# Altium PCB leo_power_pcb.PcbDoc (part 1 of 3)
Units mm, origin at the board's own origin, x right, y up, seen from the top; angles counter-clockwise.
Board outline 127 x 85.5 mm, 4 copper layers (TOP_Layer, INT1_GND, INT2_GND, BOTTOM_Layer), stack 1.586 mm thick; 172 components, 108 nets, 524 pads, 275 vias.
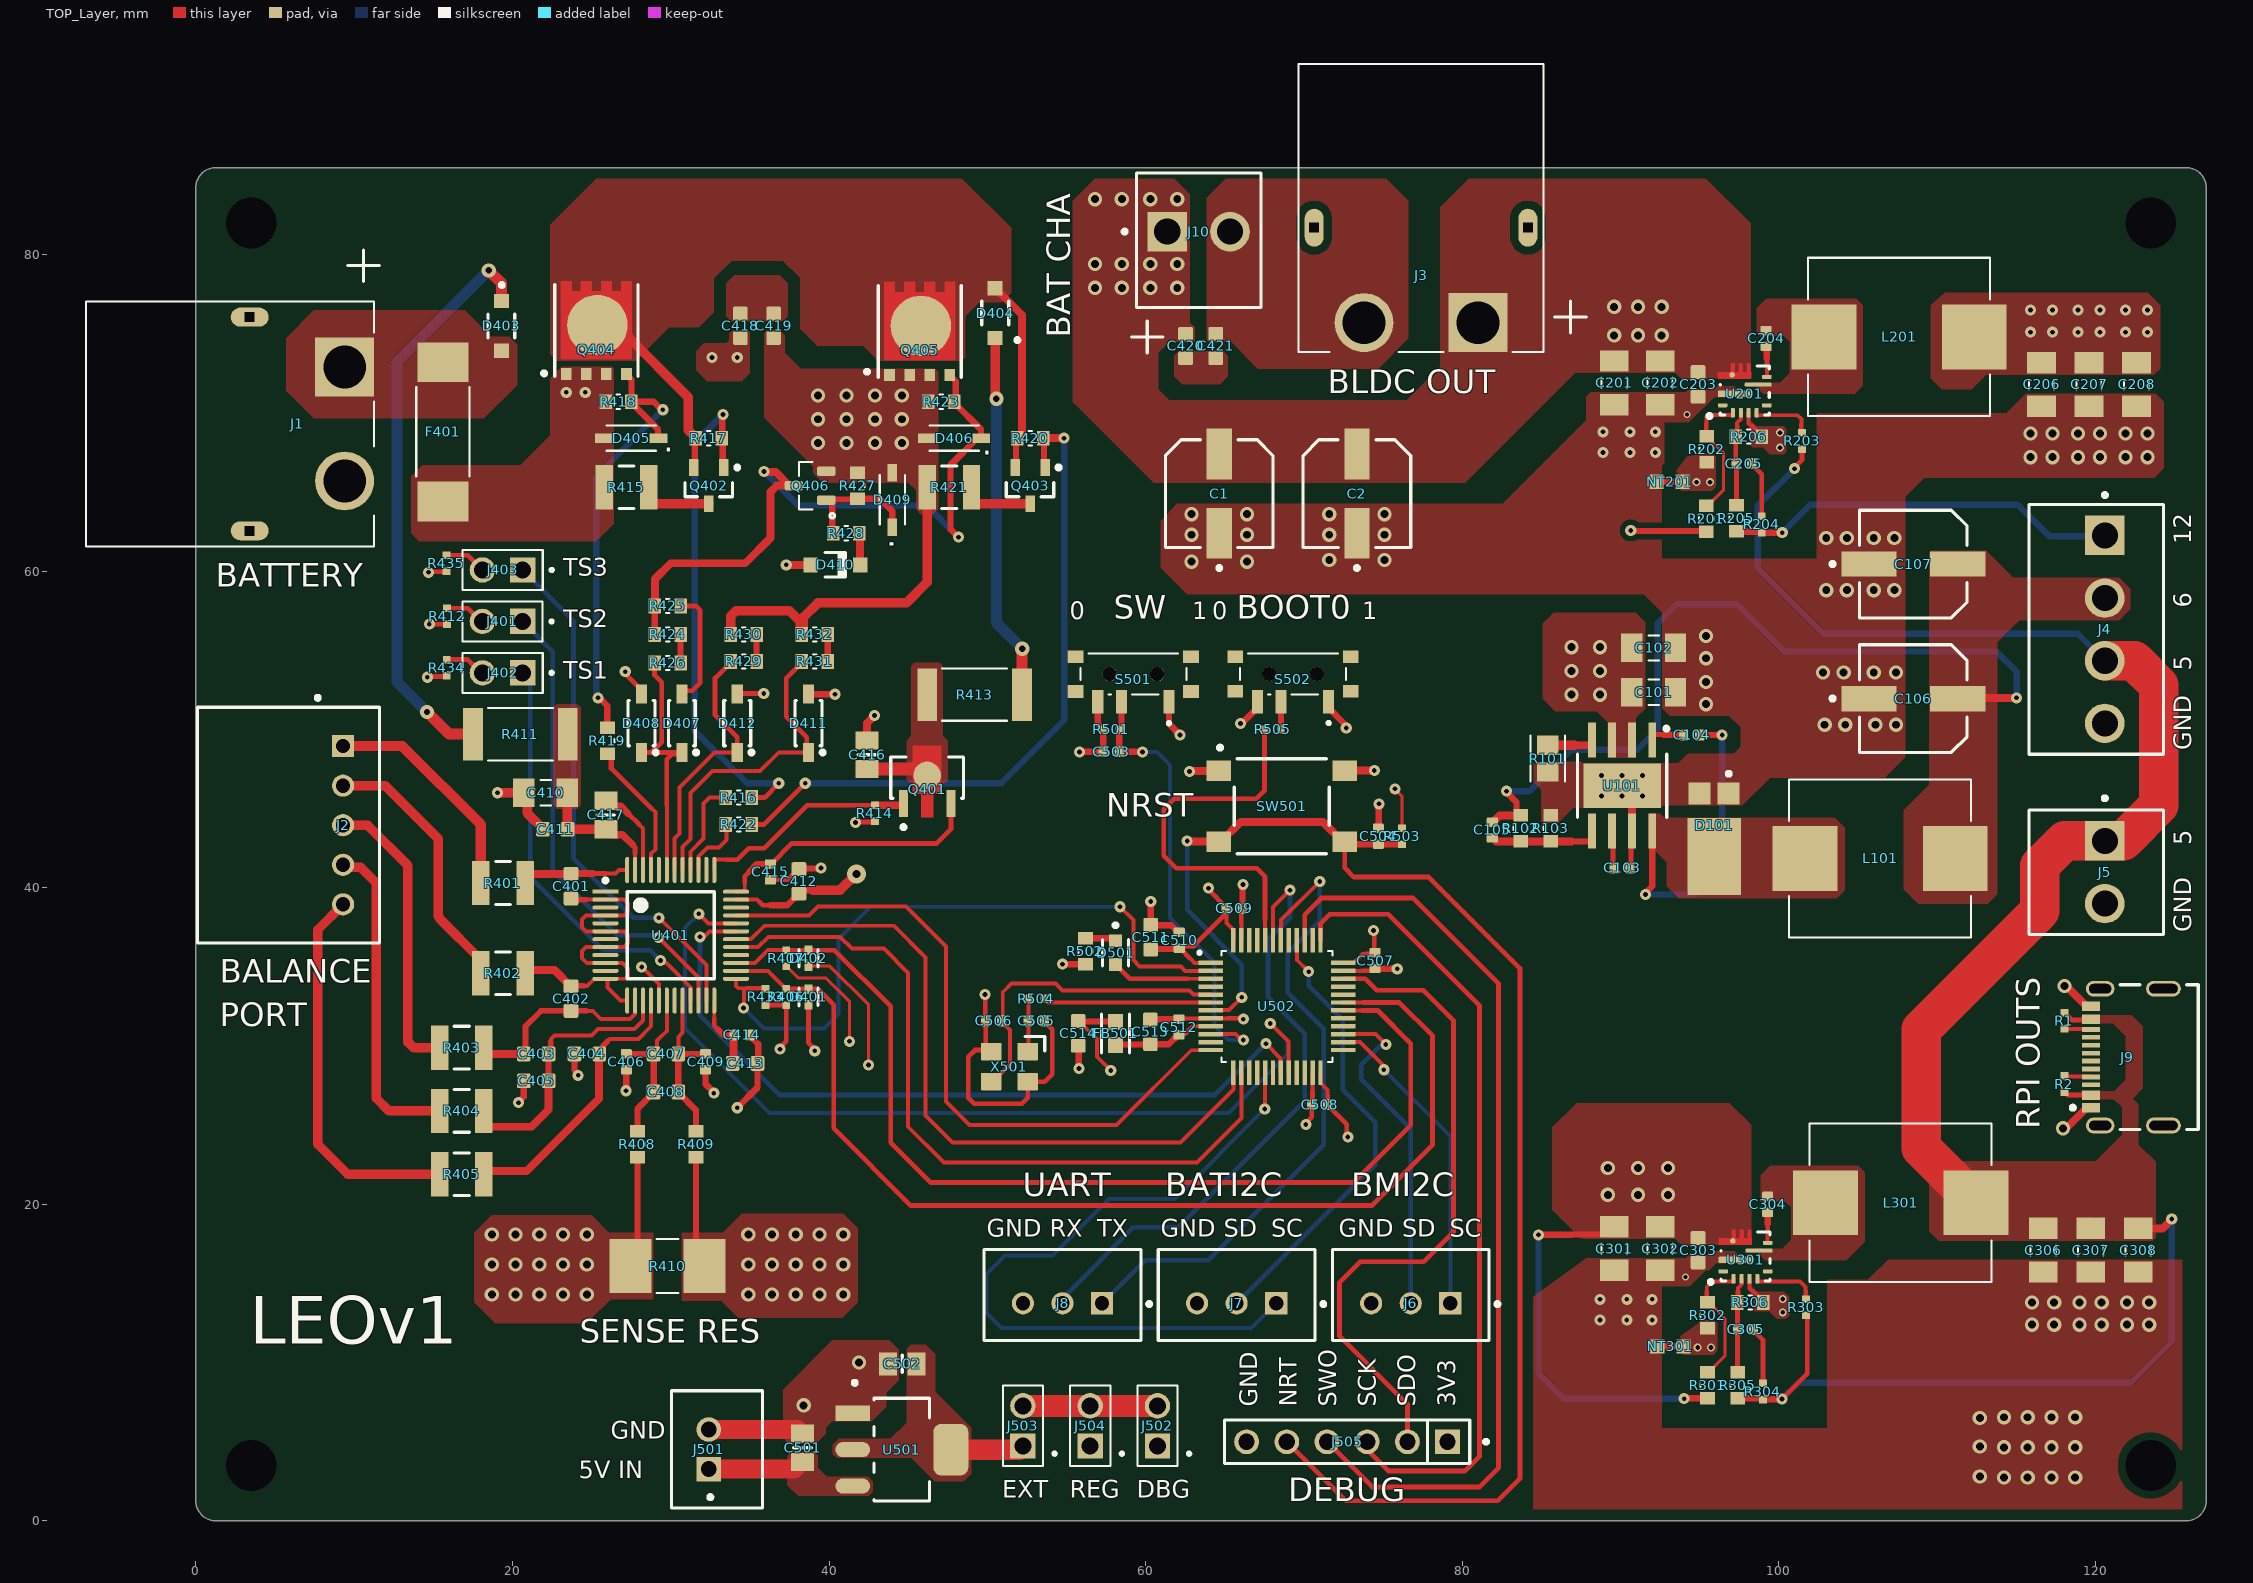
[diagram p0: TOP_Layer view]
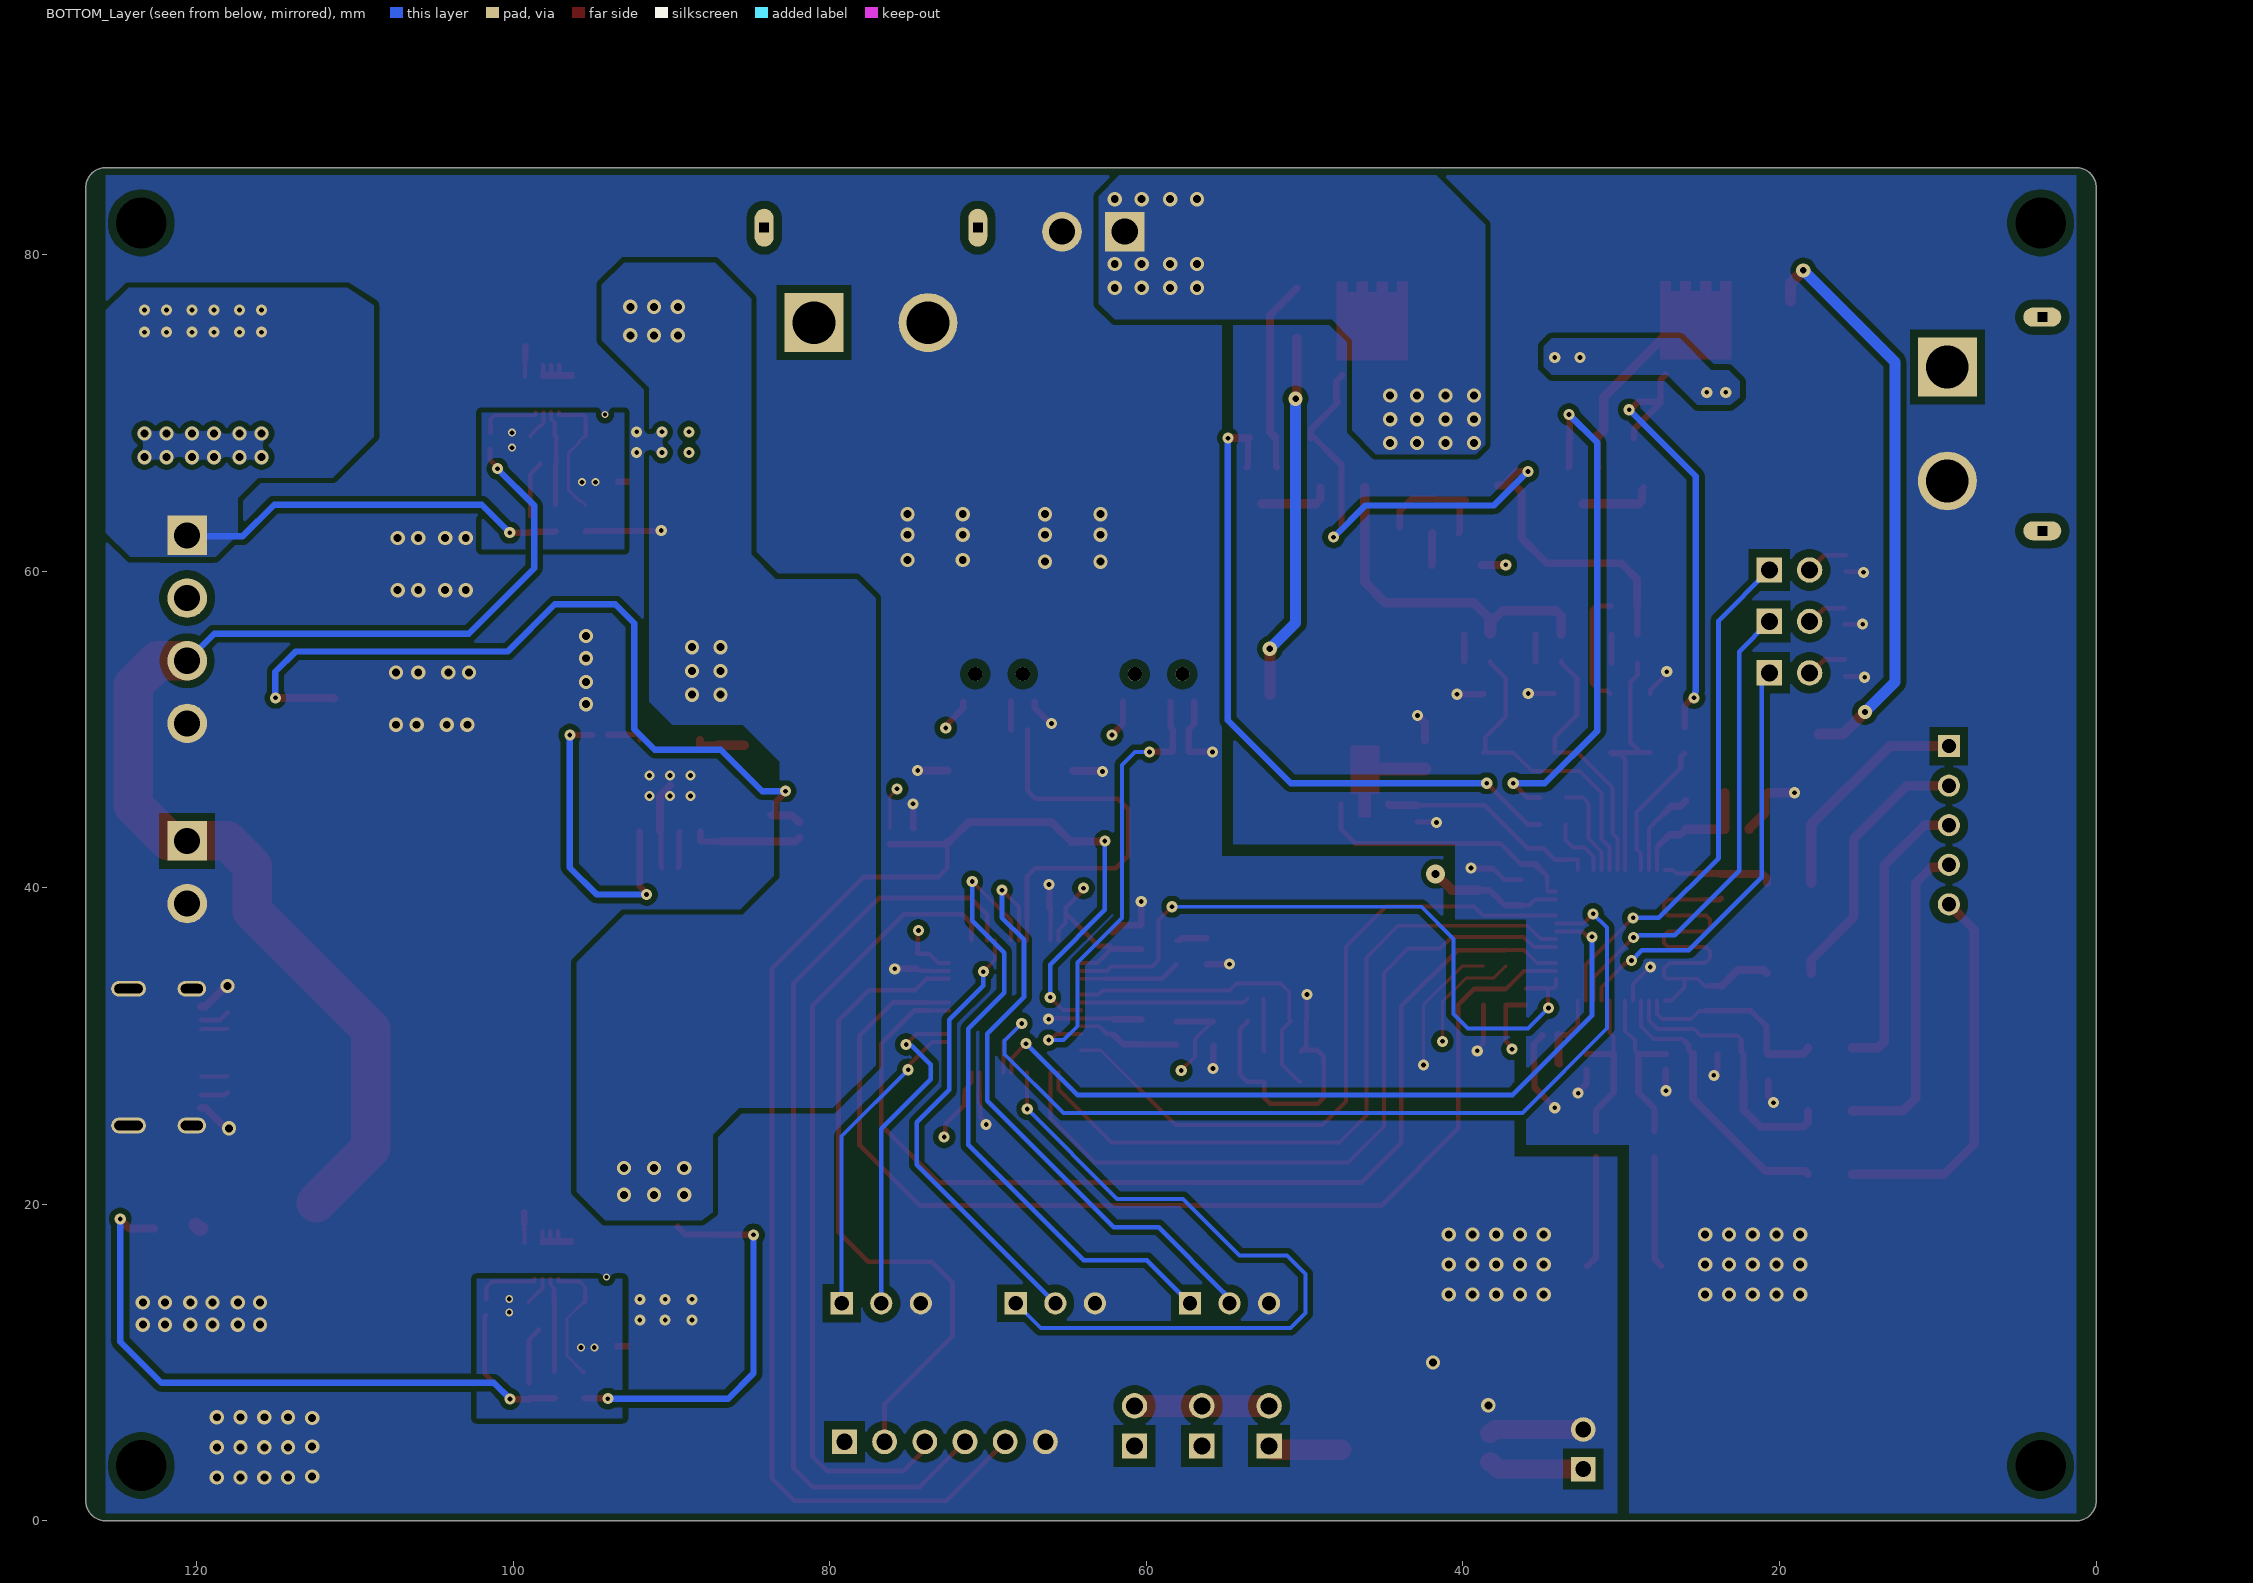
[diagram p1: BOTTOM_Layer view, seen from below]
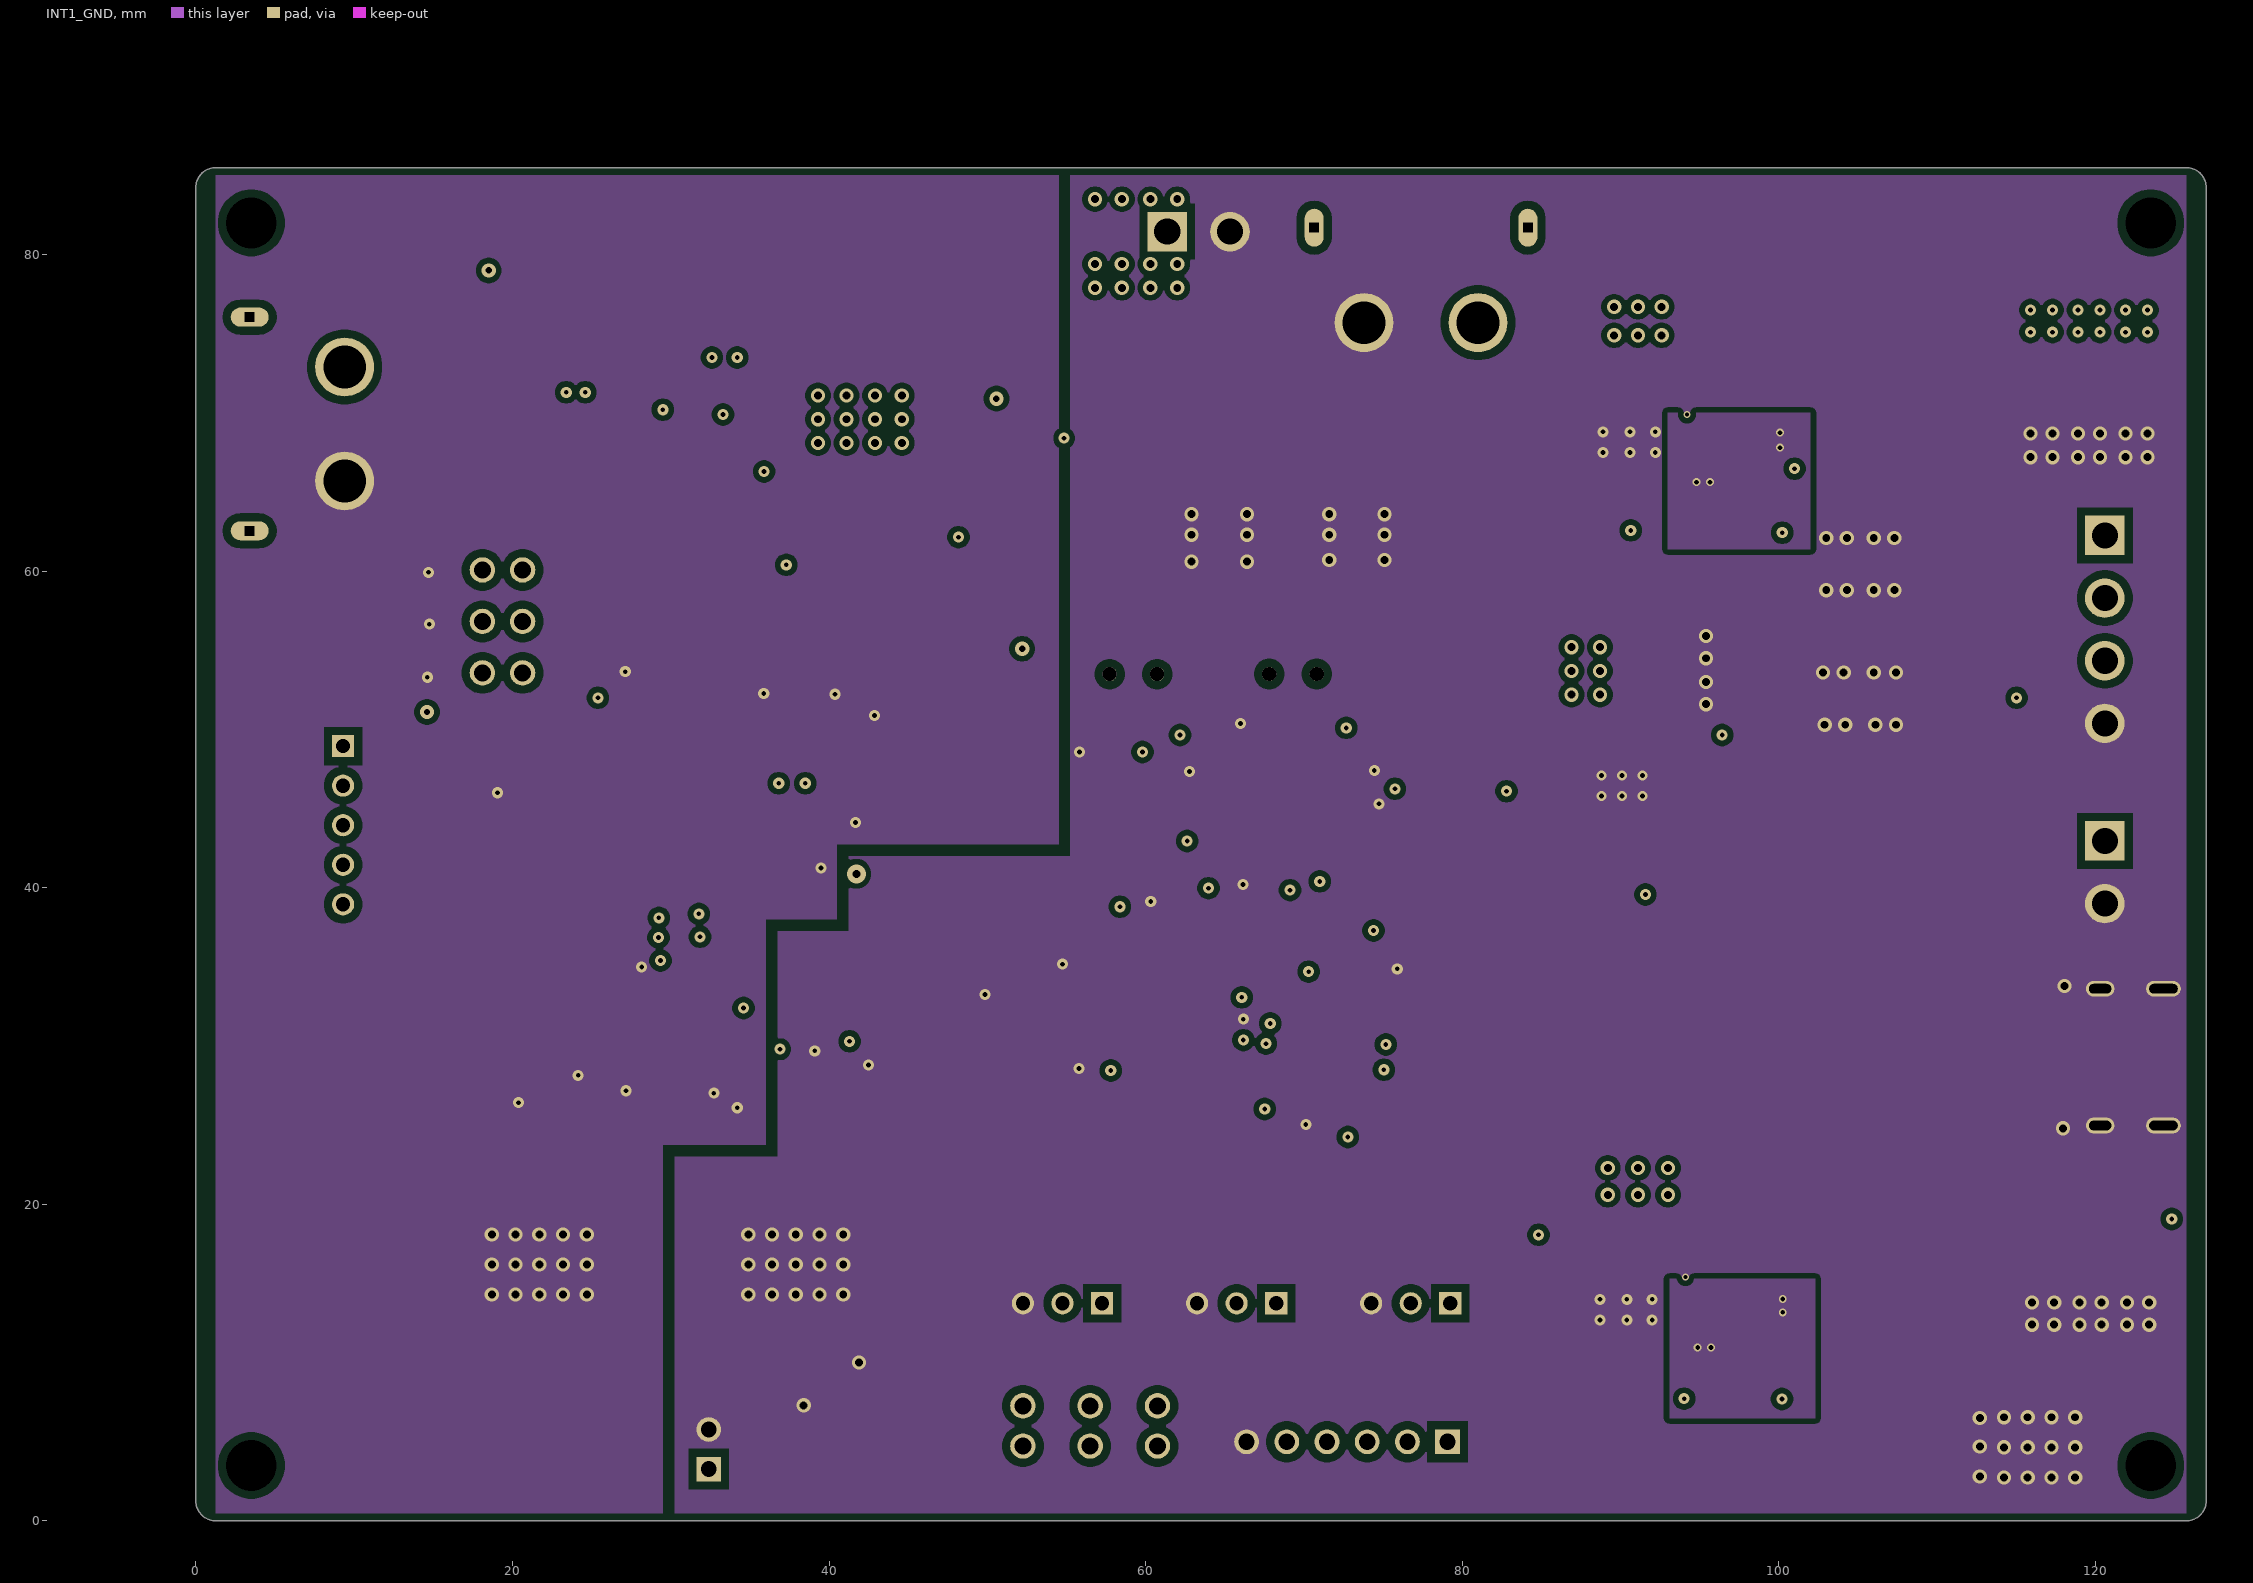
[diagram p2: INT1_GND]
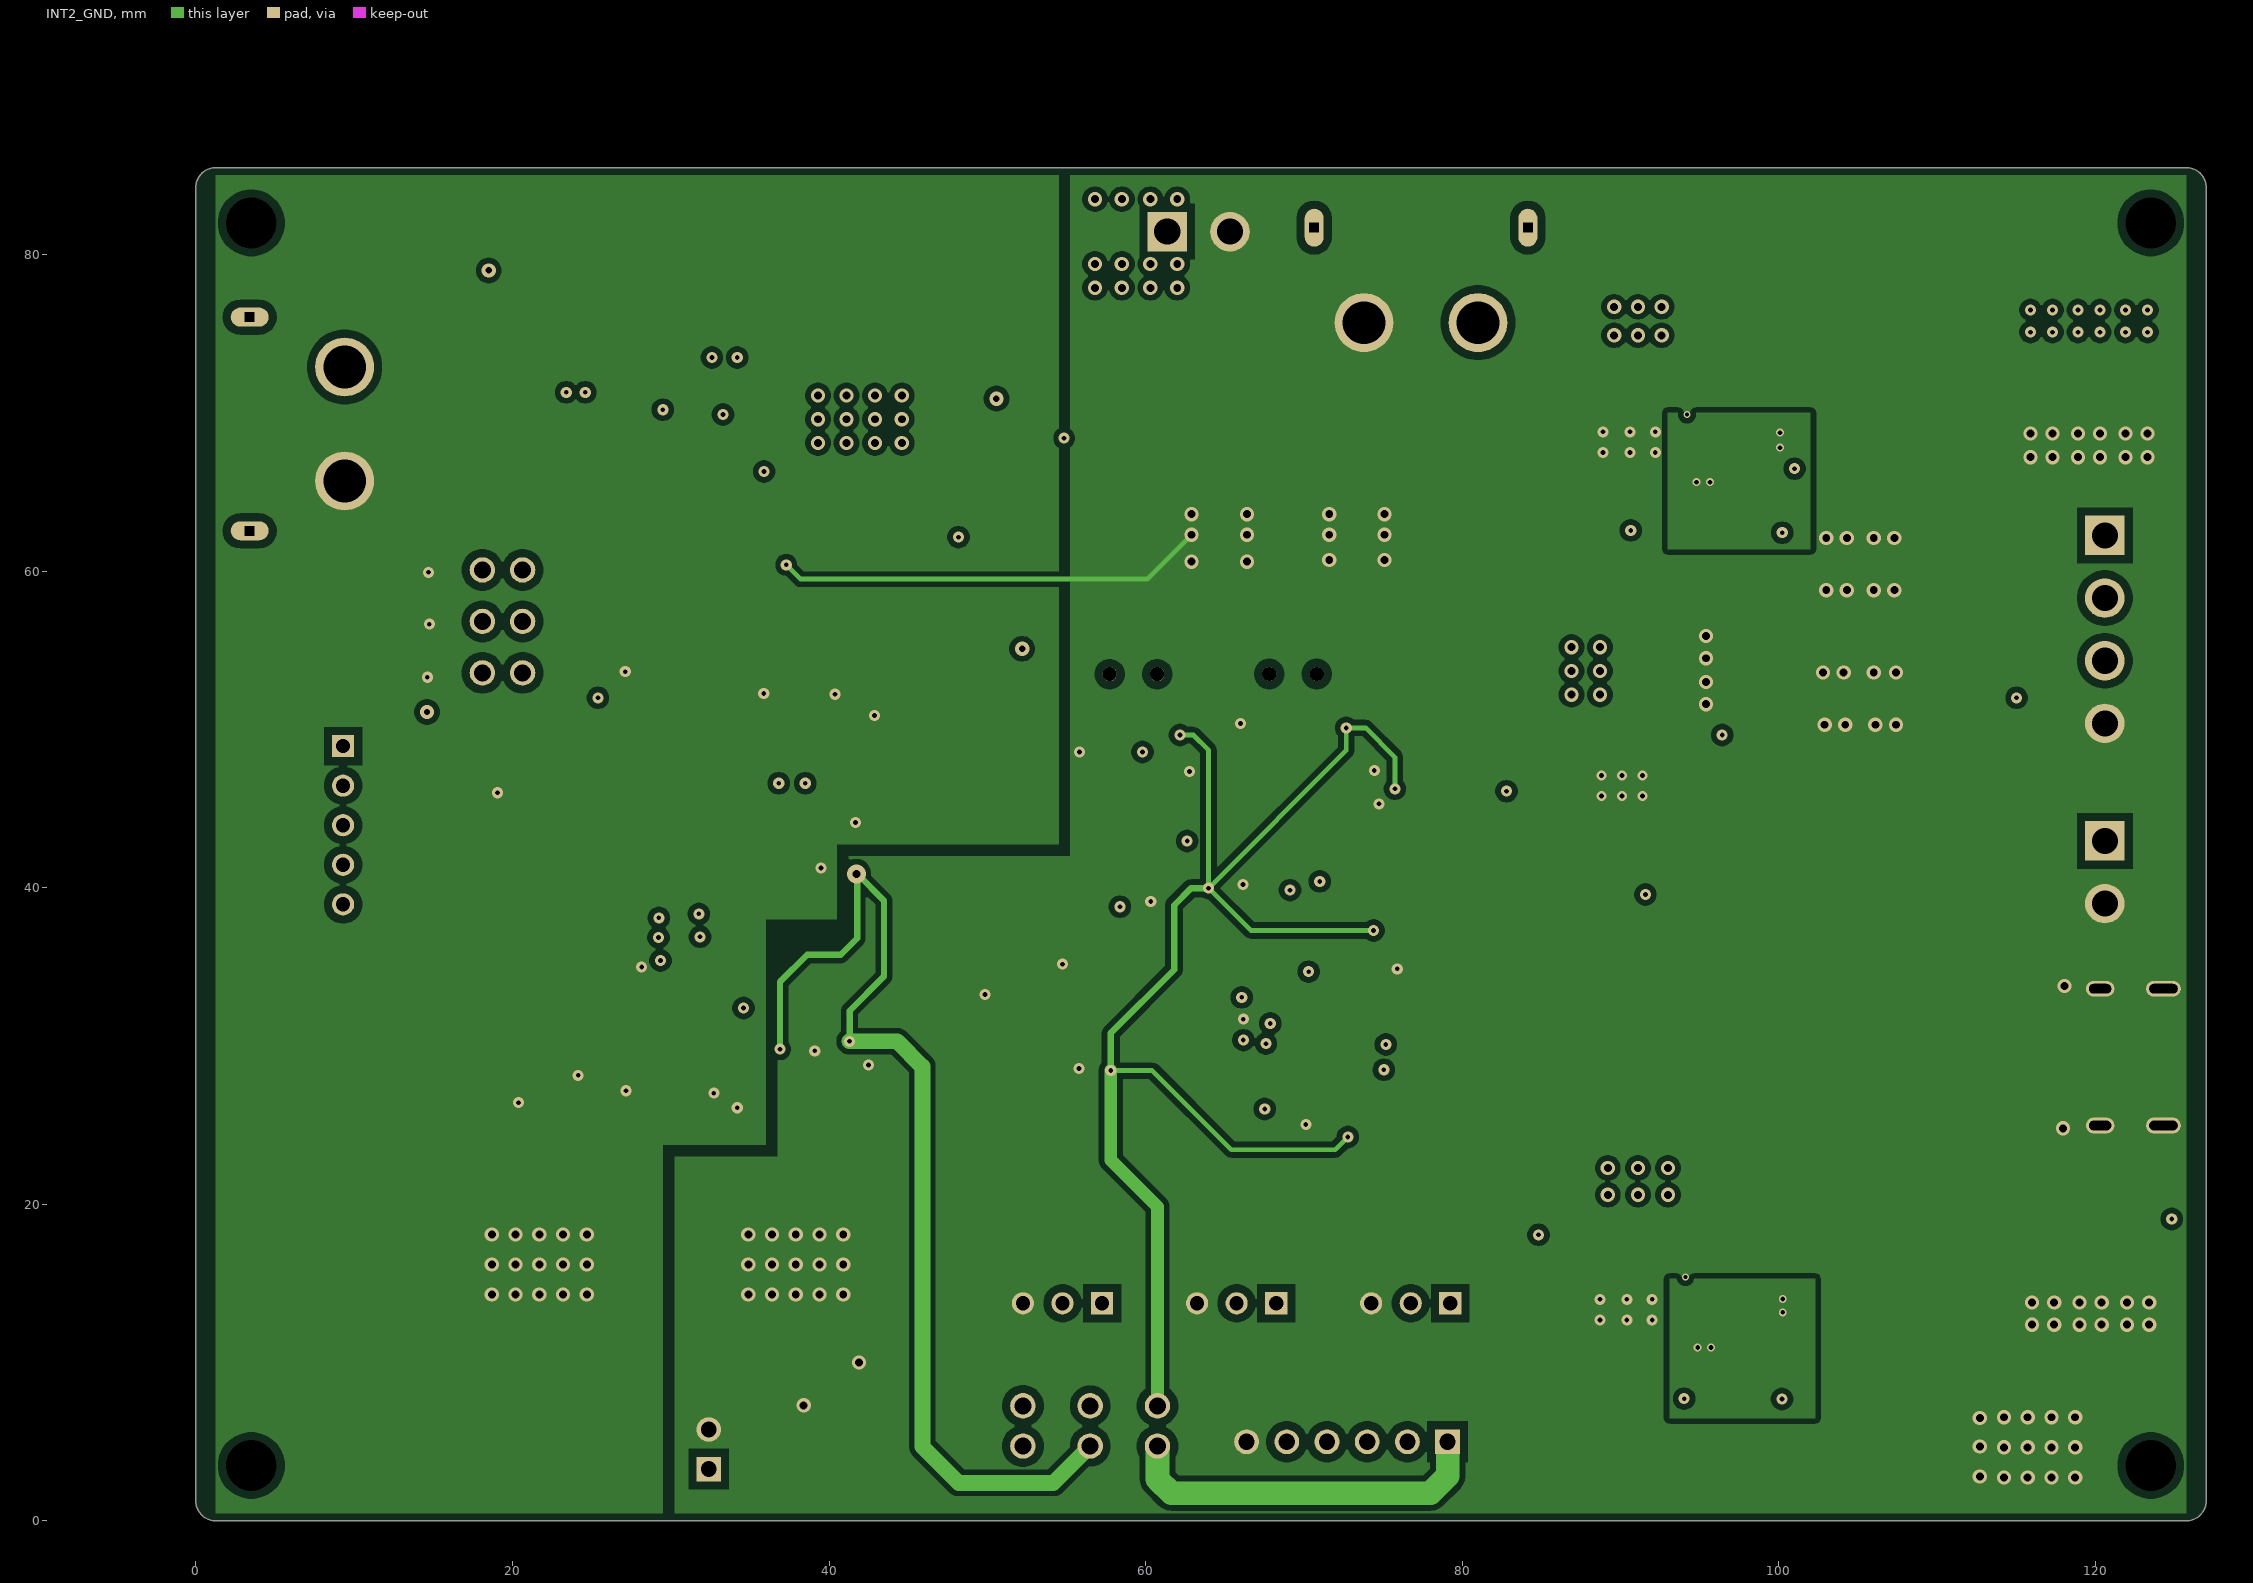
[diagram p3: INT2_GND]
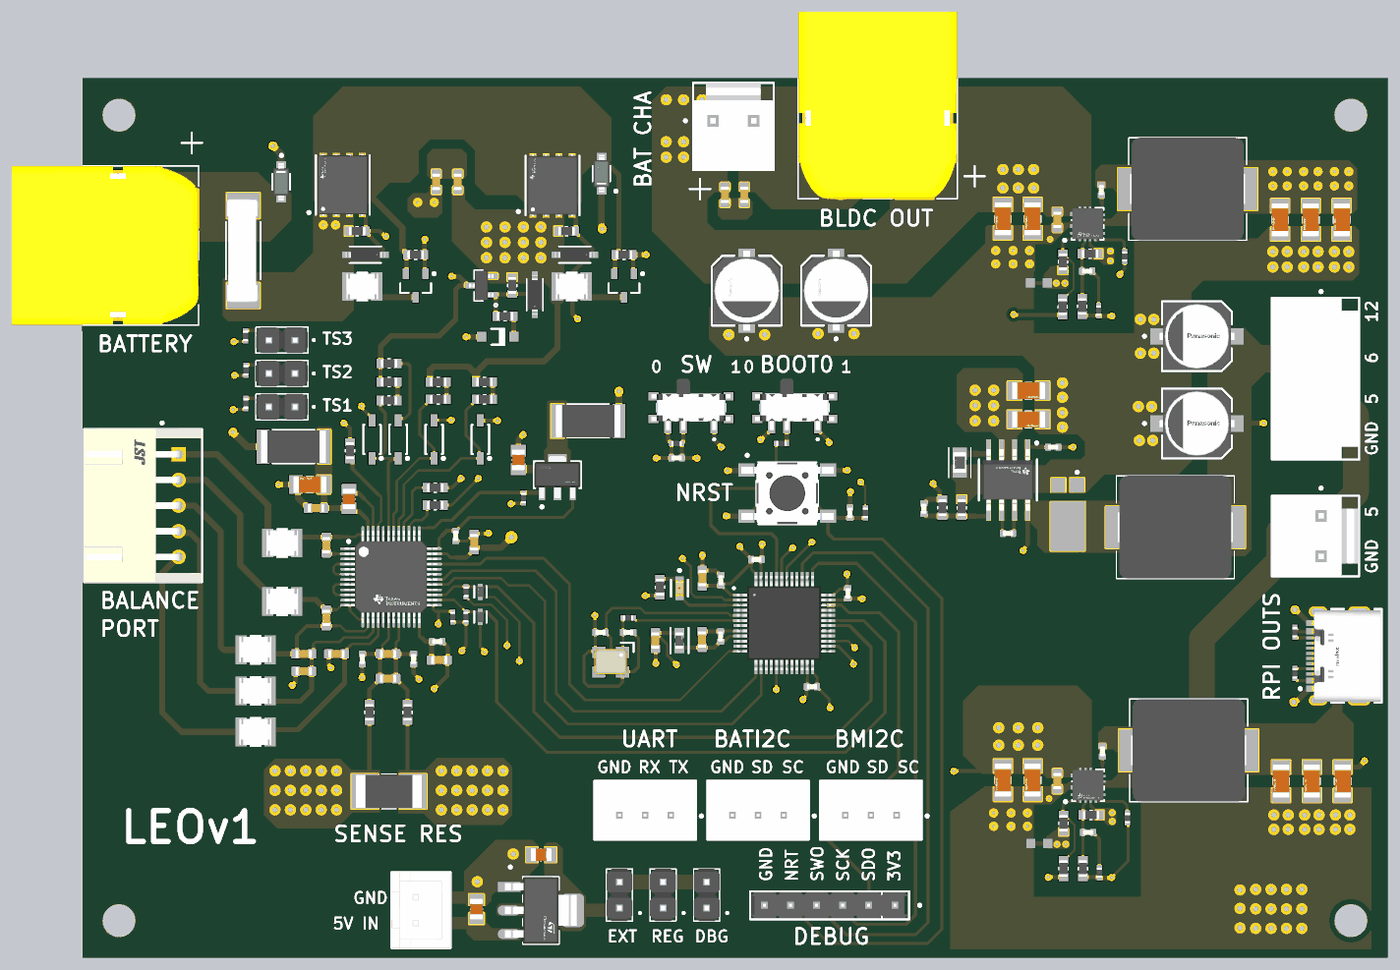
[diagram p5: 3D render of the assembled board from above, using the file's embedded part models]

## Layer stack, top to bottom
Top Solder: solder mask 0.0254, SM-001, Dk 4
TOP_Layer: signal copper 0.035
Dielectric 1: prepreg 0.2104, PP-017, Dk 4.4
INT1_GND: signal copper 0.0152
Dielectric 3: core 1.065, Core-039, Dk 4.6
INT2_GND: signal copper 0.0152
Dielectric 5: prepreg 0.2104, PP-017, Dk 4.4
BOTTOM_Layer: signal copper 0.035
Bottom Solder: solder mask 0.0254, SM-001, Dk 4

## Board outline
0,1.27 0,84.23 cw(c1.27,84.23) 1.27,85.5 125.73,85.5 cw(c125.73,84.23) 127,84.23 127,1.27 cw(c125.73,1.27) 125.73,0 1.27,0 cw(c1.27,1.27)

## Design rules (kind name [scope] priority, off if disabled: settings)
Clearance [All] p1: gap=0.2 ignorepadtopadclearanceinfootprint=FALSE except(0: Arc-Hole Track-Hole SMDPad-Hole THPad-Hole Via-Hole Fill-Hole Poly-Hole Region-Hole Text-Hole; 0.25: SMDPad-Via SMDPad-Fill SMDPad-Poly SMDPad-Region; 0.3: SMDPad-THPad THPad-Via; 0.35: Arc-Fill Arc-Poly Arc-Region Track-Fill Track-Poly Track-Region Via-Fill Via-Poly Via-Region Fill-Fill Fill-Poly Fill-Region Poly-Poly Poly-Region Region-Region; 0.5: THPad-THPad THPad-Fill THPad-Poly THPad-Region)
HoleSize [All] p1: absolutevalues=TRUE maxlimit=6.3 minlimit=0.15 maxpercent=80.000 minpercent=20.000
HoleToHoleClearance [All] p1: gap=0.2 allowstackedmicrovias=TRUE
MinimumSolderMaskSliver [All] p1: minsoldermaskwidth=0.15
PlaneClearance [All] p1: clearance=0.5
PolygonConnect [All] p1: connectstyle=Direct reliefconductorwidth=0.254 reliefentries=4 polygonreliefangle="90 Angle" airgapwidth=0.254
RoutingVias [All] p1: holewidth=0.3 width=0.7 viastyle="Through Hole" minholewidth=0.15 minwidth=0.25 maxholewidth=0.5 maxwidth=1.5
SilkToSilkClearance [All] p1: silktosilkclearance=0.2
SilkToSolderMaskClearance [IsPad] p1: minsilkscreentomaskgap=0.2 clearancetoexposedcopper=TRUE
SolderMaskExpansion [All] p1: expansion=0.1 istentingtop=FALSE
UnRoutedNet [All] p1: checkbadconnections=TRUE
Width [All] p1: maxlimit=7 minlimit=0.2 preferedwidth=0.3 midlayer1_maxwidth=1 bottomlayer_maxwidth=1 minimp=50.000000 maximp=50.000000 favimp=50.000000
23 further rules are at their usual default settings.

## Components (designator, comment, footprint, x,y, rotation, side; value= is the part's Value field where it differs from the comment)
C1 "150u" FP-FTD8-MFG 64.65,64.9 r90 top
C2 "150u" FP-FTD8-MFG 73.35,64.9 r90 top
C101 "22u" CAP_1206 92.1,52.35 r0 top value=22uF
C102 "22u" CAP_1206 92.1,55.15 r0 top value=22uF
C103 "8.2n" CAP_0402 90.1,41.25 r180 top
C104 "100n" CAP_0402 94.5,49.65 r180 top
C105 "390p" CAP_0402 81.9,43.65 r90 top
C106 "100u" FP-OS-CON-SMT-C6-MFG 108.5,51.95 r0 top
C107 "100u" FP-OS-CON-SMT-C6-MFG 108.5,60.45 r0 top
C201 "22u" CAP_1206 89.6,71.9 r270 top value=22uF
C202 "22u" CAP_1206 92.5,71.9 r270 top value=22uF
C203 "100n" CAP_0603 94.9,71.8 r90 top
C204 "100n" CAP_0402 99.2,74.7 r90 top
C205 "100p" CAP_0402 97.8,66.8 r0 top
C206 "47u" CAP_1206 116.6,71.8 r270 top value=22uF
C207 "47u" CAP_1206 119.6,71.8 r270 top value=22uF
C208 "47u" CAP_1206 122.6,71.8 r270 top value=22uF
C301 "22u" CAP_1206 89.6,17.2 r270 top value=22uF
C302 "22u" CAP_1206 92.5,17.2 r270 top value=22uF
C303 "100n" CAP_0603 94.9,17.1 r90 top
C304 "100n" CAP_0402 99.3,20 r90 top
C305 "100p" CAP_0402 97.9,12.1 r0 top
C306 "47u" CAP_1206 116.7,17.1 r270 top value=22uF
C307 "47u" CAP_1206 119.7,17.1 r270 top value=22uF
C308 "47u" CAP_1206 122.7,17.1 r270 top value=22uF
C401 "220n" CAP_0603 23.7,40.1 r90 top
C402 "220n" CAP_0603 23.7,33 r90 top
C403 "220n" CAP_0603 21.5,29.5 r180 top
C404 "220n" CAP_0603 24.7,29.5 r0 top
C405 "220n" CAP_0603 21.5,27.8 r0 top
C406 "100n" CAP_0402 27.2,29 r90 top
C407 "100p" CAP_0603 29.7,29.5 r0 top
C408 "100n" CAP_0603 29.7,27.1 r0 top
C409 "100n" CAP_0402 32.2,29 r90 top
C410 "10u" CAP_1206 22.1,46 r180 top value=22uF
C411 "100p" CAP_0603 22.7,43.7 r0 top
C412 "1u" CAP_0603 38.1,40.4 r90 top
C413 "2.2u" CAP_0603 34.7,28.9 r180 top
C414 "10n" CAP_0402 34.5,30.7 r180 top
C415 "22n" CAP_0402 36.3,41 r90 top
C416 "1u" CAP_0805 42.4,48.4 r90 top
C417 "470n" CAP_0805 25.9,44.6 r270 top
C418 "100n" CAP_0603 34.4,75.5 r90 top
C419 "100n" CAP_0603 36.5,75.5 r270 top
C420 "100n" CAP_0603 62.525,74.225 r90 top
C421 "100n" CAP_0603 64.425,74.225 r270 top
C501 "10u" CAP_0805 38.325,4.625 r90 top
C502 "10u" CAP_0805 44.625,9.925 r180 top
C503 "100n" CAP_0402 57.825,48.6 r0 top
C504 "100n" CAP_0402 74.7,43.25 r270 top
C505 "100n" CAP_0402 53.1,31.6 r180 top
C506 "100n" CAP_0402 50.4,31.6 r0 top
C507 "100n" CAP_0402 74.5,35.4 r90 top
C508 "100n" CAP_0402 71,26.3 r0 top
C509 "100n" CAP_0402 65.6,38.7 r180 top
C510 "100n" CAP_0402 62.125,36.675 r270 top
C511 "4.7u" CAP_0603 60.325,36.875 r270 top
C512 "100n" CAP_0402 62.1,31.2 r270 top
C513 "1u" CAP_0603 60.3,30.9 r270 top
C514 "1u" CAP_0603 55.75,30.8 r90 top
D101 "PDS760-13" DIOD-POWERDI5-3_V 95.92,43.094 r270 top
D401 "TPD1E10B06DPYR" FP-DPY0002A-MFG 38.7,33.1 r270 top
D402 "TPD1E10B06DPYR" FP-DPY0002A-MFG 38.7,35.55 r270 top
D403 "1N5819HW-7-F" FP-SOD123-MFG 19.3,75.5 r270 top
D404 "1N5819HW-7-F" FP-SOD123-MFG 50.5,76.3 r90 top
D405 "MMSZ5246B-7-F" SOD123_DIO 27.5,68.4 r180 top locked
D406 "MMSZ5246B-7-F" SOD123_DIO 47.9,68.4 r180 top locked
D407 "BAT46W-7-F" DIOD-SOD-123-2_V 30.7,50.4 r270 top
D408 "BAT46W-7-F" DIOD-SOD-123-2_V 28.15,50.4 r270 top
D409 "MMSZ5246B-7-F" SOD123_DIO 44,64.5 r90 top locked
D410 "1N4148W-7-F" DIOD-SOD123-2_V 40.4,60.4 r0 top
D411 "BAT46W-7-F" DIOD-SOD-123-2_V 38.7,50.4 r270 top
D412 "BAT46W-7-F" DIOD-SOD-123-2_V 34.2,50.4 r270 top
D501 "LTST-C190KRKT" FP-LTST-C190KRKT-MFG 58.1,35.9 r270 top
F401 "0463030.ER" FUSE_0463_LTF-M 15.6,68.8 r270 top
FB501 "220R" FP-MPZ1608-0_8-IPC_B 58.1,30.8 r90 top
J1 "XT60PW-M" AMASS_XT60PW-M 3.4,69.3 r90 top
J2 "S5B-XH-A(LF)(SN)" FP-S5B-XH-A_LF_SN-MFG 5.85,43.95 r90 top
J3 "XT60PW-M" AMASS_XT60PW-M 77.4,81.7 r0 top
J4 "B4P-VH-B(LF)(SN)" FP-B4P-VH-B_LF_SN-MFG 120.05,56.32 r270 top
J5 "B2P-VH-B(LF)(SN)" FP-B2P-VH-B_LF_SN-MFG 120.05,40.98 r270 top
J6 "B3B-XH-A(LF)(SN)" FP-B3B-XH-A_LF_SN-MFG 76.75,14.275 r180 top
J7 "B3B-XH-A(LF)(SN)" FP-B3B-XH-A_LF_SN-MFG 65.75,14.275 r180 top
J8 "B3B-XH-A(LF)(SN)" FP-B3B-XH-A_LF_SN-MFG 54.75,14.275 r180 top
J9 "217179-0001" "FP-2171790001-MFG USB-C 2.0" 123.15,29.3 r90 top locked
J10 "B2P-VH-B(LF)(SN)" FP-B2P-VH-B_LF_SN-MFG 63.35,80.9 r0 top
J401 "2P_HEADER" "HARWIN_M20-9990246 2P Header" 19.37,56.825 r180 top
J402 "2P_HEADER" "HARWIN_M20-9990246 2P Header" 19.375,53.575 r180 top
J403 "2P_HEADER" "HARWIN_M20-9990246 2P Header" 19.375,60.075 r180 top
J501 "B2B-XH-A(LF)(SN)" FP-B2B-XH-A_LF_SN-MFG 32.925,4.525 r90 top
J502 "2P_HEADER" "HARWIN_M20-9990246 2P Header" 60.75,6 r90 top
J503 "2P_HEADER" "HARWIN_M20-9990246 2P Header" 52.25,6 r90 top
J504 "2P_HEADER" "HARWIN_M20-9990246 2P Header" 56.5,6 r90 top
J505 "22-28-4060" FP-22-28-4060-MFG 72.73,5 r180 top
L101 "8.2u" IND_104CDMCCDS-8R2MC 106.4,41.85 r0 top
L201 "8.2u" IND_104CDMCCDS-8R2MC 107.6,74.8 r0 top
L301 "6.8u" IND_104CDMCCDS-8R2MC 107.7,20.1 r0 top
NT201 "Net-Tie" NET-TIE_SMD 93.1,65.65 r0 top locked net-tie
NT301 "Net-Tie" NET-TIE_SMD 93.15,11.025 r0 top net-tie
Q401 "ZXTN2010ZTA" FP-SOT89-MFG 46.2,46.954 r0 top
Q402 "BSS83P H6327" INF-SOT23_N 32.4,65.4 r270 top
Q403 "BSS83P H6327" INF-SOT23_N 52.7,65.4 r270 top
Q404 "CSD18531Q5AT" FP-DQJ0008A-MFG 25.3,75.2 r90 top
Q405 "CSD18531Q5AT" FP-DQJ0008A-MFG 45.73,75.15 r90 top
Q406 "2N7002K-7" SOT91P240X110-3N 38.8,65.4 r180 top
R1 "10K" RES_0402 118.05,31.6 r90 top
R2 "10K" RES_0402 118.05,27.6 r270 top
R101 "49.9K" RES_0805 85.4,48.15 r270 top
R102 "91K" RES_0603 83.7,43.75 r90 top
R103 "13K" RES_0603 85.6,43.75 r270 top
R201 "107K" RES_0603 95.425,63.325 r270 top
R202 "12.7K" RES_0603 95.45,67.7 r90 top
R203 "100K" RES_0402 101.475,68.225 r90 top
R204 "20K" RES_0402 98.925,62.95 r90 top
R205 "191K" RES_0603 97.325,63.35 r270 top
R206 "10K" RES_0603 98.1,68.5 r180 top
R301 "107K" RES_0603 95.5,8.575 r270 top
R302 "12.7K" RES_0603 95.5,13 r90 top
R303 "100K" RES_0402 101.725,13.5 r270 top
R304 "20K" RES_0402 99,8.175 r270 top
R305 "75K" RES_0603 97.4,8.575 r270 top
R306 "10K" RES_0603 98.2,13.8 r180 top
R401 "20R" RES_1210 19.4,40.3 r0 top
R402 "20R" RES_1210 19.4,34.6 r0 top
R403 "20R" RES_1210 16.8,29.9 r0 top
R404 "20R" RES_1210 16.8,25.9 r0 top
R405 "20R" RES_1210 16.8,21.9 r0 top
R406 "10K" RES_0402 37.3,33.1 r270 top
R407 "10K" RES_0402 37.3,35.55 r270 top
R408 "100R" RES_0603 27.9,23.8 r90 top
R409 "100R" RES_0603 31.6,23.8 r90 top
R410 "CURR_SEN_RES" CURR_SEN_RES 29.8,16.1 r0 top
R411 "100R" RES_2512 20.5,49.7 r0 top
R412 "10K" RES_0402 15.875,57.15 r90 top
R413 "100R" RES_2512 49.2,52.2 r0 top
R414 "10M" RES_0402 42.9,44.7 r90 top
R415 "750R" RES_1210 27.2,65.3 r0 top
R416 "5.1K" RES_0603 34.3,45.7 r180 top
R417 "10M" RES_0603 32.4,68.4 r180 top
R418 "10M" RES_0603 26.7,70.7 r180 top
R419 "5.1K" RES_0603 26,49.3 r90 top
R420 "10M" RES_0603 52.7,68.4 r180 top
R421 "750R" RES_1210 47.6,65.3 r180 top
R422 "5.1K" RES_0603 34.3,44 r0 top
R423 "10M" RES_0603 47.1,70.7 r180 top
R424 "5.1K" RES_0603 29.8,56 r180 top
R425 "1K" RES_0603 29.8,57.8 r180 top
R426 "5.1K" RES_0603 29.8,54.2 r0 top
R427 "10M" RES_0603 41.8,65.4 r90 top
R428 "10K" RES_0603 41.1,62.4 r180 top
R429 "5.1K" RES_0603 34.6,54.3 r180 top
R430 "5.1K" RES_0603 34.6,56 r0 top
R431 "5.1K" RES_0603 39.1,54.3 r180 top
R432 "5.1K" RES_0603 39.1,56 r0 top
R433 "10K" RES_0402 36,33.1 r270 top
R434 "10K" RES_0402 15.85,53.9 r90 top
R435 "10K" RES_0402 15.825,60.5 r90 top
R501 "10K" RES_0402 57.825,50 r0 top
R502 "750R" RES_0603 56.2,36 r90 top
R503 "10K" RES_0402 76.2,43.25 r90 top
R504 "0R" RES_0402 53.1,33 r0 top
R505 "10K" RES_0402 68.025,50 r180 top
S501 "SSSS811101" SW_SSSS811101 59.225,53.5 r180 top
S502 "SSSS811101" SW_SSSS811101 69.31,53.504 r180 top
SW501 "SW1" FP-PTS645SM43SMTR92LFS-MFG 68.6,45.15 r0 top
U101 "LMR14030SDDAR" FP-DDA0008E-MFG 90.1,46.45 r270 top locked
U201 "TPS56637RPAR" FP-RPA0010A-MFG 97.85,71.41 r90 top locked
U301 "TPS56637RPAR" FP-RPA0010A-MFG 97.9,16.7 r90 top locked
U401 "BQ7694202PFBR" FP-PFB0048A-IPC_B 30,37 r0 top locked
U501 "LDL1117S33R" FP-SOT223-0046067-IPC_A 44.597,4.502 r0 top
U502 "STM32L431CCT6" QFP50P900X900X160-48N 68.3,32.5 r0 top locked
X501 "24MHz" XTAL_3225 51.4,28.7 r180 top

## Footprints (in the part's own frame and the unit in brackets; to place one, negate y for a bottom-side part, rotate by r counter-clockwise, add the part's x,y. Pads: shape width x height; smd on the part's side, far side on the other; paste and mask are expansions set on the pad)
AMASS_XT60PW-M [mm] "plug ROHS"
  rect 3.716x3.716 / inner round 3.716 / far side rect 3.716x3.716 hole 2.7: 1(3.6,-6)
  round 3.716 hole 2.7: 2(-3.6,-6)
  oval 1.2x2.4 hole 0.6 square: S1(6.75,0) S2(-6.75,0)
  silkscreen extent -7.75,-7.85 7.75,10.35, body extent -7.75,-7.85 7.75,10.35, height 8.4
CAP_0402 [mm] "±10% 50V Ceramic Capacitor X7R 0402"
  rrect25% 0.6x0.7 smd mask+0.05: 1(-0.5,0) 2(0.5,0)
  body extent -0.5,-0.26 0.5,0.26, height 0.37
CAP_0603 [mm] "50V Ceramic Capacitor X7R 0603"
  rrect25% 0.87x0.93 smd: 1(-0.78,0) 2(0.78,0)
  body extent -0.8,-0.4 0.8,0.4, height 0.9
CAP_0805 [mm] "10uF 16V 805"
  rect 1.15x1.45 smd: 1(-0.9,0) 2(0.9,0)
  silkscreen extent 0,-0.55 0,0.55, body extent -1,-0.63 1,0.63, height 1.35
CAP_1206 [mm] "25V 22uF X5R ±10% 1206 Multilayer Ceramic Capacitors MLCC - SMD/SMT ROHS"
  rect 1.354x1.806 smd: 1(-1.376,0) 2(1.376,0)
  silkscreen extent -0.32,-0.8 0.32,0.8, body extent -1.6,-0.8 1.6,0.8, height 1.8
CURR_SEN_RES [mm] "RES 1mO ±1% 3W 2512"
  rect 2.64x3.42 smd: 1(-2.34,0) 2(2.34,0)
  silkscreen extent -0.7,-1.7 0.7,1.7, body extent -3.2,-1.6 3.2,1.6, height 0.9
DIOD-POWERDI5-3_V [mm] "60V 620mV@7A 7A Power-DI-5 Schottky Diodes ROHS"
  rect 1.4x1.39 smd: 1(-2.856,0.92) 2(-2.856,-0.92)
  rect 4.86x3.36 smd: 3(1.126,0)
  silkscreen extent -4.23,0.8 -3.98,1.05, body extent -2.69,-1.99 2.69,1.99, height 1.15
DIOD-SOD123-2_V [mm] "Diode 100 V 150mA Surface Mount SOD-123"
  rect 0.9x0.95 smd: 1(-1.575,0) 2(1.575,0)
  silkscreen extent -0.64,-0.82 0.64,0.77, body extent -1.35,-0.77 1.35,0.77, height 1.45
DIOD-SOD-123-2_V [mm] "SOD-123, 2-Leads, Body 2.85x1.7mm (max), Pitch 3.7mm"
  rect 1.2x0.7 smd: 1(-1.85,0) 2(1.85,0)
  silkscreen extent -1.43,-0.85 1.97,1.03, body extent -1.42,-0.85 1.43,0.85, height 1.45
FP-22-28-4060-MFG [mm] "Connector Header Through Hole 6 position 0.100\" (2.54mm)"
  rect 1.57x1.57 hole 1.02 paste-1000 mask+0: 1(-6.35,0)
  round 1.57 hole 1.02 paste-1000 mask+0: 2(-3.81,0) 3(-1.27,0) 4(1.27,0) 5(3.81,0) 6(6.35,0)
  silkscreen extent -8.9,-1.37 7.75,1.37, body extent -7.85,-1.47 7.85,1.47, height 0.25
"FP-2171790001-MFG USB-C 2.0" [mm] "USB 2.0 5A 1 16P -40?~+85? SMD USB, DVI, HDMI Connector Assemblies RoHS"
  rect 0.6x1.15 smd paste+0 mask+0: A1B12(-3.2,3.425) A4B9(-2.4,3.425) B1A12(3.2,3.425) B4A9(2.4,3.425)
  rect 0.3x1.15 smd paste+0 mask+0: A5(-1.25,3.425) A6(-0.25,3.425) A7(0.25,3.425) A8(1.25,3.425) B5(1.75,3.425) B6(0.75,3.425) B7(-0.75,3.425) B8(-1.75,3.425)
  rrect100% 1x1.8 hole 1.4 slot 0.6 at 0 deg paste-2539.97 mask+0: S1(-4.32,2.85) S2(4.32,2.85)
  rrect100% 1x2.2 hole 1.8 slot 0.6 at 0 deg paste-2539.97 mask+0: S3(-4.32,-1.15) S4(4.32,-1.15)
  silkscreen extent -4.57,-3.35 4.57,4.7, body extent -4.92,-3.45 4.92,4.1, height 0.25
FP-B2B-XH-A_LF_SN-MFG [mm] "CONN HEADER TH 6POS 2.5mm"
  rect 1.55x1.55 hole 1 paste-1000 mask+0: 1(-1.25,0.525)
  round 1.55 hole 1 paste-1000 mask+0: 2(1.25,0.525)
  silkscreen extent -3.7,-2.88 3.7,2.88, body extent -3.8,-2.98 3.8,2.98, height 0.25
FP-B2P-VH-B_LF_SN-MFG [mm] "CONN HEADER TH 2POS 3.96mm"
  rect 2.5x2.5 hole 1.65 paste-1000 mask+0: 1(-1.98,0.55)
  round 2.5 hole 1.65 paste-1000 mask+0: 2(1.98,0.55)
  silkscreen extent -4.8,-4.25 3.93,4.25, body extent -4.03,-4.35 4.03,4.35, height 0.25
FP-B3B-XH-A_LF_SN-MFG [mm] "Connector Header 3 position 2.5mm Pitch 3A Through Hole -25?~+85?"
  rect 1.4x1.4 hole 0.9 paste-1000 mask+0: 1(-2.5,0.525)
  round 1.4 hole 0.9 paste-1000 mask+0: 2(0,0.525) 3(2.5,0.525)
  silkscreen extent -5.6,-2.88 4.95,2.88, body extent -5.05,-2.98 5.05,2.98, height 0.25
FP-B4P-VH-B_LF_SN-MFG [mm] "CONN HEADER TH 4POS 3.96mm"
  rect 2.5x2.5 hole 1.65 paste-1000 mask+0: 1(-5.94,0.55)
  round 2.5 hole 1.65 paste-1000 mask+0: 2(-1.98,0.55) 3(1.98,0.55) 4(5.94,0.55)
  silkscreen extent -8.61,-4.25 7.89,4.25, body extent -7.99,-4.35 7.99,4.35, height 0.25
FP-DDA0008E-MFG [mm] "Buck Adjustable 800mV~28V 3.5A 4V~40V SO-8-EP DC-DC Converters ROHS"
  rect 2.2x0.5 smd paste-1000 mask+0: 1(-2.875,1.905) 2(-2.875,0.635) 3(-2.875,-0.635) 4(-2.875,-1.905) 5(2.875,-1.905) 6(2.875,-0.635) 7(2.875,0.635) 8(2.875,1.905)
  rect 2.8x4.9 smd paste-1000 mask-1000: 9(0,0)
  silkscreen extent -3.72,-2.83 2,2.93, body extent -4.08,-2.68 4.08,2.68, height 0.25
FP-DPY0002A-MFG [mm] "14VC Clamp 6A@8/20us Ipp ESD DIODE X1-SON-2(0.6x1)"
  rect 0.6x0.5 smd paste+0 mask+0: 1(-0.5,0) 2(0.5,0)
  silkscreen extent -0.56,-0.6 0.55,0.6, body extent -0.9,-0.45 0.9,0.45, height 0.25
FP-DQJ0008A-MFG [mm] "MOSFET N-CH 60V 134A VSONP-8(5x6)3"
  rect 0.75x0.675 smd paste-1000 mask+0: 1(-2.752,1.905) 2(-2.752,0.635) 3(-2.752,-0.635) 4(-2.752,-1.905)
  round 3.821 smd paste-1000 mask+0: 5-6-7-8(0.35,-0.07)
  TOP_Layer region: 3.127,-2.242 3.127,-1.568 2.472,-1.568 2.472,-0.972 3.127,-0.972 3.127,-0.297 2.472,-0.297 2.472,0.298 3.127,0.298 3.127,0.973 2.472,0.973 2.472,1.568 3.127,1.568 3.127,2.243 -1.823,2.242 -1.823,-2.242
  silkscreen extent -2.9,-2.63 2.9,3.42, body extent -3.23,-2.6 3.23,2.6, height 0.25
FP-FTD8-MFG [mm] "CAP ALUM 150uF ±20% 35V SMD"
  rect 3.2x1.6 smd paste+0 mask+0: 1(-2.5,0) 2(2.5,0)
  silkscreen extent -4.82,-3.4 3.4,3.4, body extent -4.35,-3.65 4.35,3.65, height 0.25
FP-LTST-C190KRKT-MFG [mm] "603 RED LED"
  rect 0.8x0.8 smd paste+0 mask+0: 1(-0.75,0) 2(0.75,0)
  silkscreen extent -1.85,-0.82 0.82,0.82, body extent -1.25,-0.55 1.25,0.55, height 0.25
FP-MPZ1608-0_8-IPC_B [mm] "220O@100MHz 1 Line Ferrite Bead 0603 2.2A 50mO"
  rect 1.006x0.958 smd paste+0 mask+0: 1(-0.726,0) 2(0.726,0)
  silkscreen extent -1.23,-0.88 1.23,0.88, body extent -1.48,-0.73 1.48,0.73, height 0.25
FP-OS-CON-SMT-C6-MFG [mm] "100uF ±20% 16V Aluminum - Polymer Capacitors SMD,D6.3xL5.9mm 2000hrs@105?"
  rect 3.5x1.6 smd paste+0 mask+0: 1(-2.8,0) 2(2.8,0)
  silkscreen extent -5.22,-3.4 3.4,3.4, body extent -4.8,-3.65 4.8,3.65, height 0.25
FP-PFB0048A-IPC_B [mm] "BQ7694202PFBR"
  rect 1.655x0.252 smd paste+0 mask+0.03: 1(-4.125,2.75)
  rrect100% 1.655x0.252 smd paste+0 mask+0.03: 2(-4.125,2.25) 3(-4.125,1.75) 4(-4.125,1.25) 5(-4.125,0.75) 6(-4.125,0.25) 7(-4.125,-0.25) 8(-4.125,-0.75) 9(-4.125,-1.25) 10(-4.125,-1.75) 11(-4.125,-2.25) 12(-4.125,-2.75) 25(4.125,-2.75) 26(4.125,-2.25) 27(4.125,-1.75) 28(4.125,-1.25) 29(4.125,-0.75) 30(4.125,-0.25) 31(4.125,0.25) 32(4.125,0.75) 33(4.125,1.25) 34(4.125,1.75) 35(4.125,2.25) 36(4.125,2.75)
  rrect100% 0.252x1.655 smd paste+0 mask+0.03: 13(-2.75,-4.125) 14(-2.25,-4.125) 15(-1.75,-4.125) 16(-1.25,-4.125) 17(-0.75,-4.125) 18(-0.25,-4.125) 19(0.25,-4.125) 20(0.75,-4.125) 21(1.25,-4.125) 22(1.75,-4.125) 23(2.25,-4.125) 24(2.75,-4.125) 37(2.75,4.125) 38(2.25,4.125) 39(1.75,4.125) 40(1.25,4.125) 41(0.75,4.125) 42(0.25,4.125) 43(-0.25,4.125) 44(-0.75,4.125) 45(-1.25,4.125) 46(-1.75,4.125) 47(-2.25,4.125) 48(-2.75,4.125)
  silkscreen extent -4.25,-2.75 2.75,3.58, body extent -5.2,-5.2 5.2,5.2, height 0.25
FP-PTS645SM43SMTR92LFS-MFG [mm]
  rect 1.55x1.3 smd paste+0 mask+0: 1(-3.975,2.25) 2(3.975,2.25) 3(-3.975,-2.25) 4(3.975,-2.25)
  silkscreen extent -4.02,-3 3,3.82, body extent -4.5,-3 4.5,3, height 4.3
FP-RPA0010A-MFG [mm]
  rrect40% 0.6x0.25 smd paste+0 mask+0: 1(-1.4,0.75) 2(-1.4,0.25) 3(-1.4,-0.25) 4(-1.4,-0.75)
  rrect40% 0.25x0.6 smd paste+0 mask+0: 5(-0.93,-1.4) 7(0.87,-1.4) 10(-0.93,1.4)
  rrect40% 0.25x1.7 smd paste-1000 mask+0: 6(0.37,-0.85)
  round 0.35 smd paste+0 mask+0: 8(0.99,0.8)
  rrect25% 0.4x2.1 smd paste-1000 mask+0: 9(-0.21,0.65)
  TOP_Layer region: 0.8,1.7 0.781,1.696 0.765,1.685 0.754,1.669 0.75,1.65 0.75,1.65 0.75,-0.35 0.754,-0.369 0.765,-0.385 0.781,-0.396 0.8,-0.4 0.8,-0.4 1.15,-0.4 1.15,-0.375 1.66,-0.375 1.685,-0.368 1.703,-0.35 1.71,-0.325 1.71,-0.325 1.71,-0.175 1.706,-0.156 1.695,-0.14 1.679,-0.129 1.66,-0.125 1.66,-0.125 1.15,-0.125 1.15,0.125 1.66,0.125 1.679,0.129 1.695,0.14 1.706,0.156 1.71,0.175 1.71,0.175 1.71,0.325 1.703,0.35 1.685,0.368 1.66,0.375 1.66,0.375 1.15,0.375 1.15,0.625 1.66,0.625 1.679,0.629 1.695,0.64 1.706,0.656 1.71,0.675 1.71,0.675 1.71,0.825 1.703,0.85 1.685,0.868 1.66,0.875 1.66,0.875 1.2,0.875 1.181,0.879 1.165,0.89 1.154,0.906 1.15,0.925 1.15,0.925 1.15,1.65 1.143,1.675 1.125,1.693 1.1,1.7 1.1,1.7
  silkscreen extent -1.73,-1.55 1.55,2.35, body extent -1.8,-1.8 1.81,1.8, height 0.25
FP-S5B-XH-A_LF_SN-MFG [mm] "CONN HEADER TH R/A 5POS 2.5mm"
  rect 1.4x1.4 hole 0.9 paste-1000 mask+0: 1(5,-3.45)
  round 1.4 hole 0.9 paste-1000 mask+0: 2(2.5,-3.45) 3(0,-3.45) 4(-2.5,-3.45) 5(-5,-3.45)
  silkscreen extent -7.45,-5.75 8.17,5.75, body extent -7.55,-5.85 7.55,5.85, height 0.25
FP-SOD123-MFG [mm] "Voltage: 40V Current: 1A"
  rect 0.9x0.95 smd paste+0 mask+0: 1(-1.575,0) 2(1.575,0)
  silkscreen extent -2.7,-0.85 0.75,0.85, body extent -2.12,-0.95 2.12,0.95, height 0.25
FP-SOT89-MFG [mm] "TRANS NPN 60V 5A SOT-89"
  rect 0.58x1.73 smd paste+0 mask+0: 1(-1.5,-1.635) 3(1.5,-1.635)
  round 1.74 smd paste+0 mask+0: 2(0,0.146)
  TOP_Layer region: -0.9,2.03 0.9,2.03 0.9,-1 0.38,-1 0.38,-2.5 -0.38,-2.5 -0.38,-1 -0.9,-1
  silkscreen extent -2.3,-3.25 2.3,1.3, body extent -2.4,-2.6 2.4,2.13, height 0.25
FP-SOT223-0046067-IPC_A [mm] "3.3V Positive Fixed SOT-223-4 Voltage Regulators - Linear, Low Drop Out (LDO) Regulators RoHS"
  rect 2.204x0.96 smd paste+0 mask+0: 1(-3.1,2.3)
  rrect100% 2.204x0.96 smd paste+0 mask+0: 2(-3.1,0) 3(-3.1,-2.3)
  rrect44% 2.204x3.26 smd paste+0 mask+0: 4(3.1,0)
  silkscreen extent -3.1,-3.25 1.75,4.35, body extent -4.7,-3.75 4.7,3.75, height 0.25
FUSE_0463_LTF-M [mil] "FUSE BRD MNT 30A SMD"
  rect 99x127 smd paste+0 mask+4: 1(-173,0) 2(173,0)
  silkscreen extent -111,-67 111,67, body extent -199,-65 199,58, height 122
"HARWIN_M20-9990246 2P Header" [mm] "2P Header 2.54mm"
  rect 1.605x1.605 / inner round 1.605 / far side rect 1.605x1.605 hole 1.07: 1(-1.27,0)
  round 1.605 hole 1.07: 2(1.27,0)
  silkscreen extent -3.2,-1.27 2.54,1.27, body extent -2.54,-1.27 2.54,1.27, height 8.74
IND_104CDMCCDS-8R2MC [mm] "8.3A 8.2uH Molded Inductor ±20% 12A SMD,11.5x10mm Power Inductors ROHS"
  rect 4.1x4.1 smd: 1(-4.75,0) 2(4.75,0)
  silkscreen extent -5.75,-5 5.75,5, body extent -5.6,-5 5.6,5, height 4
INF-SOT23_N [mm] "SOT23, 3-Leads, Body 2.9x1.3 mm, Pitch 0.95 mm, IPC Medium Density"
  rect 1.05x0.6 smd: 1(-1.15,0.95) 2(-1.15,-0.95) 3(1.15,0)
  silkscreen extent -1.27,-1.5 0.7,1.93, body extent -0.7,-1.5 0.7,1.5, height 1.1
NET-TIE_SMD [mm] "Net-Tie"
  rect 0.9x0.9 smd mask-10: 1(-0.825,0) 2(0.825,0)
  TOP_Layer region: -0.45,-0.2 0.45,-0.2 0.45,0.2 -0.45,0.2
QFP50P900X900X160-48N [mm] "LQFP-48(7x7)"
  rect 1.56x0.28 smd mask+0.02: 1(-4.18,2.75) 2(-4.18,2.25) 3(-4.18,1.75) 4(-4.18,1.25) 5(-4.18,0.75) 6(-4.18,0.25) 7(-4.18,-0.25) 8(-4.18,-0.75) 9(-4.18,-1.25) 10(-4.18,-1.75) 11(-4.18,-2.25) 12(-4.18,-2.75) 25(4.18,-2.75) 26(4.18,-2.25) 27(4.18,-1.75) 28(4.18,-1.25) 29(4.18,-0.75) 30(4.18,-0.25) 31(4.18,0.25) 32(4.18,0.75) 33(4.18,1.25) 34(4.18,1.75) 35(4.18,2.25) 36(4.18,2.75)
  rect 0.28x1.56 smd mask+0.02: 13(-2.75,-4.18) 14(-2.25,-4.18) 15(-1.75,-4.18) 16(-1.25,-4.18) 17(-0.75,-4.18) 18(-0.25,-4.18) 19(0.25,-4.18) 20(0.75,-4.18) 21(1.25,-4.18) 22(1.75,-4.18) 23(2.25,-4.18) 24(2.75,-4.18) 37(2.75,4.18) 38(2.25,4.18) 39(1.75,4.18) 40(1.25,4.18) 41(0.75,4.18) 42(0.25,4.18) 43(-0.25,4.18) 44(-0.75,4.18) 45(-1.25,4.18) 46(-1.75,4.18) 47(-2.25,4.18) 48(-2.75,4.18)
  silkscreen extent -5,-3.5 3.5,3.5, body extent -4.6,-4.6 4.6,4.6, height 1.6
RES_0402 [mm] "0402 Thick Film Resistor AEC-Q200"
  rect 0.475x0.5 smd: 1(-0.512,0) 2(0.512,0)
  body extent -0.5,-0.25 0.5,0.25, height 0.35
RES_0603 [mm] "100mW 75V Thick Film Resistor ±100ppm/? ±1% 0603 Chip Resistor - Surface Mount RoHS"
  rect 0.79x0.93 smd: 1(-0.82,0) 2(0.82,0)
  silkscreen extent -0.11,-0.45 0.11,0.45, body extent -0.8,-0.4 0.8,0.4, height 0.55
RES_0805 [mm] "49.9kO ±0.1% 125mW 0805 Thin Film Resistor AEC-Q200"
  rect 1.205x1.362 smd paste+0 mask+0: 1(-0.851,0) 2(0.851,0)
  silkscreen extent -1.45,-1.08 1.45,1.08, body extent -1.7,-0.93 1.7,0.93, height 0.25
RES_1210 [mm] "RES 20O ±1% 500mW 1210"
  rect 1.1x2.8 smd paste+0 mask+0: 1(-1.4,0) 2(1.4,0)
  silkscreen extent -0.48,-1.35 0.48,1.35, body extent -2.05,-1.5 2.05,1.5, height 0.25
RES_2512 [mm] "RES 100O ±1% 1W 2512"
  rect 1.24x3.32 smd: 1(-2.99,0) 2(2.99,0)
  silkscreen extent -2.05,-1.65 2.05,1.65, body extent -3.15,-1.58 3.15,1.58, height 0.7
SOD123_DIO [mm] "DIODE ZENER 16V 500mW SOD-123"
  rect 1.111x0.601 smd paste+0 mask+0: 1(-1.725,0) 2(1.725,0)
  silkscreen extent -1.55,-0.8 1.55,0.8, body extent -1.92,-0.67 1.92,0.67, height 0.81
SOT91P240X110-3N [mm] "MOSFET N-CH 60V 380mA SOT-23"
  rrect50% 1.18x0.61 smd: 1(-1.025,0.915) 2(-1.025,-0.915) 3(1.025,0)
  silkscreen extent -1.54,-1.5 0.7,2.04, body extent -1.2,-1.45 1.2,1.45, height 1.15
SW_SSSS811101 [mm] "Slide Switch SPDT 300mA @ 5V Surface Mount, Right Angle Rectangular Columnar"
  rect 0.7x1.5 smd: 1(-2.25,1.75) 2(0.75,1.75) 3(2.25,1.75)
  rect 1x0.8 smd: SH1(-3.65,1.1) SH2(3.65,1.1) SH3(-3.65,-1.1) SH4(3.65,-1.1)
  round 0.9 hole 0.9 unplated: ""(-1.5,0) ""(1.5,0)
  silkscreen extent -3.35,-1.3 3.35,3.2, body extent -3.85,-2.8 3.85,2.2, height 1.4
XTAL_3225 [mm] "Crystal 24MHz ±10ppm 9pF 40O SMD3225-4P"
  rrect10% 1.3x1.1 smd: 1(-1.15,-0.95) 2(1.15,-0.95) 3(1.15,0.95) 4(-1.15,0.95)
  silkscreen extent -2.23,-1.89 -1,-1, body extent -1.6,-1.28 1.6,1.22, height 0.61

## Part data
C1 C2: library part EEEFTV151XAP, "CAP ALUM 150UF 20% 35V SMD", Capacitance=150uF, Case/Package=Radial, Dielectric Material=Aluminium, ESR (Equivalent Series Resistance)=160mR, Leakage Current=52.5uA, Max Operating Temperature=105°C, Min Operating Temperature=-55°C, Package Quantity=900, Ripple Current=600mA, Tolerance=20%, Voltage=35V, Construction=Cylindrical, Contact Plating=Tin, Diameter=6.3mm, Height=7.7mm, Height - Seated (Max)=0.315inch, Lead Diameter=0.65mm, Lead Free="Lead Free", Lead Pitch=1.8mm, Length=7.7mm, Life (Hours)=2000Hour, Mount="Surface Mount", Number of Pins=8, Packaging="Tape and Reel", Polarity=Polar, Radiation Hardening=No, REACH SVHC="No SVHC", Ripple Current (AC)=600mA, RoHS Compliant=Yes, Series=FT, Termination=SMD/SMT, Voltage Rating=35V, Voltage Rating (DC)=35V
C101 C102 C201 C202 C206 C207 C208 C301 C302 C306 C307 C308 C410: library part CAP_1206, "Ceramic Capacitor, Multilayer, Ceramic, 25V, 10% +Tol, 10% -Tol, X5R, 15% TC, 22uF, Surface Mount, 1206", Capacitance=22uF, Case/Package=1206, Dielectric=X5R, Digikey Part Number=1276-3047-1-ND, Manufacturer=Samsung, Max Operating Temperature=85°C, Min Operating Temperature=-55°C, Mouser Part Number=187-CL31A226KAHNNNE, Package=CL31H-0.2, Part Number=CL31A226KAHNNNE, Temperature="-55°C to +85°C", Temperature Coefficient=15%, Temperature Range High=+85°C, Tolerance=10%, Voltage Rating=25V, Automotive=No, ComponentLink1Description=Upverter, ComponentLink1URL=https://upverter.com/part/id/4e7a76ad8fe2f2e1/, ComponentLink2Description=Datasheet, ComponentLink2URL=https://product.samsungsem.com/mlcc/CL31A226KAHNNN.do, Digikey Description="CAP CER 22UF 25V X5R 1206", Height=1.8mm, helpURL=https://upverter.com/part/id/4e7a76ad8fe2f2e1/, Ipc Land Pattern Name=CAPC320160X160, Lead Free=Yes, Material=Ceramic, RoHS=TRUE, Supplier 1=Digi-Key, Supplier 2=Mouser, Supplier Part Number 1=1276-3047-1-ND, Supplier Part Number 2=187-CL31A226KAHNNNE, Symbol Hash=fb88589c83559698c54462c48d907c3ddae810bd717f4f20b193cecb944ab7ab, Temperature Characteristic=X5R, Temperature Range Low=-55°C, Verification Version=0.0.0.3, Voltage Rating (DC)=25V
C103 C104 C105 C204 C205 C304 C305 C406 C409 C414 C415 C503 C504 C505 C506 C507 C508 C509 C510 C512: library part CAP_0402, "±10% 50V Ceramic Capacitor X7R 0402", Package="SMD-2-2 Samsung", Check_prices=https://www.snapeda.com/parts/CL05B104KO5NNNC/Samsung/view-part/?ref=eda, MF=Samsung, MP=CL05B104KO5NNNC, SnapEDA_Link=https://www.snapeda.com/parts/CL05B104KO5NNNC/Samsung/view-part/?ref=snap
C106 C107: library part 16SVPC100M, "100uF ±20% 16V Aluminum - Polymer Capacitors SMD,D6.3xL5.9mm 2000hrs@105℃", Capacitance=100uF, Case/Package=Radial, ESR (Equivalent Series Resistance)=24mR, Leakage Current=300uA, Max Operating Temperature=105°C, Min Operating Temperature=-55°C, Package Quantity=1000, Ripple Current=2.49A, Tolerance=20%, Voltage=16V, Construction=Cylindrical, Diameter=6.3mm, Dissipation Factor=12%, Height=5.9mm, Height - Seated (Max)=0.236inch, Lead Free="Lead Free", Length=5.9mm, Life (Hours)=2000Hour, Mount="Surface Mount", Number of Pins=6, Packaging="Tape and Reel", Polarity=Polar, Radiation Hardening=No, REACH SVHC="No SVHC", Ripple Current (AC)=2.49A, RoHS Compliant=Yes, Series="OS-CON™, SVPC", Termination=SMD/SMT, Voltage Rating=16V, Voltage Rating (DC)=16V
C203 C303 C401 C402 C403 C404 C405 C407 C408 C411 C412 C413 C418 C419 C420 C421 C511 C513 C514: library part CAP_0603, "Â±10% 50V Ceramic Capacitor X7R 0603 (1608 Metric)", Package="SMD-2 Samsung", Check_prices=https://www.snapeda.com/parts/CL10B104KB8NNNC/Samsung/view-part/?ref=eda, MF="Samsung Electro-Mechanics", MP=CL10B104KB8NNNC, SnapEDA_Link=https://www.snapeda.com/parts/CL10B104KB8NNNC/Samsung/view-part/?ref=snap
C416 C417 C501 C502: library part CAP_0805, "Ceramic Capacitor X7R 0805 (2012 Metric)", Package="0805 Samsung", Check_prices=https://www.snapeda.com/parts/CL21B106KOQNNNE/Samsung+Electro-Mechanics/view-part/?ref=eda, MF="Samsung Electro-Mechanics", MP=CL21B106KOQNNNE, SnapEDA_Link=https://www.snapeda.com/parts/CL21B106KOQNNNE/Samsung+Electro-Mechanics/view-part/?ref=snap
D101: "Schottky Barrier Rectifier, 60 V, 7 A, -65 to 150 degC, 3-Pin SMD, RoHS, Tape and Reel", Average Rectified Current=7A, Case\/Package=SMD/SMT, Forward Voltage=620mV, Manufacturer="Diodes Inc", Max Forward Surge Current (Ifsm)=275A, Max Operating Temperature=150degC, Max Repetitive Reverse Voltage (Vrrm)=60V, Min Operating Temperature=-65degC, Package Description="3-Pin Surface Mount Device, Body 3.975 x 5.375 mm, Pitch 1.84 mm", Package Quantity=5000, Package Reference=POWERDI5-3, Peak Reverse Current=200uA, Contact Plating=Matte, Current Rating=7A, Datasheet URL=https://www.diodes.com/assets/Datasheets/ds30477.pdf, Datasheet Version="Rev. 13-2, 10/2012", Element Configuration=CommonAnode, Forward Current=7A, Height=1.15mm, Lead Free=LeadFree, Length=4.05mm, Manufacturer URL=http://www.diodes.com/, Mount=SurfaceMount, Mounting Technology=SurfaceMount, Number of Pins=5, Output Current=7A, Packaging=TapeandReel, Peak Non-Repetitive Surge Current=275A, Polarity=Standard, Radiation Hardening=No, REACH SVHC=NoSVHC, Reverse Voltage (DC)=60V, RoHSCompliant=true, Voltage Rating (DC)=60V, Weight=0.003386oz, Width=5.45mm
D401 D402: "TVS DIODE 5.5V 14V 2X1SON", Breakdown Voltage=6V, Capacitance=12pF, Case/Package=0402, Clamping Voltage=14V, Leakage Current=100nA, Max Operating Temperature=125°C, Min Operating Temperature=-40°C, Package Quantity=1, Peak Pulse Current=5A, Peak Pulse Power=90W, Power Line Protection=No, Reverse Standoff Voltage=5.5V, Test Current=1mA, Composition=Zener, Contact Plating=Gold, Direction=Bidirectional, Element Configuration=Single, ESD Protection=Yes, Height=0.35mm, Interface=GPIO, Lead Free="Lead Free", Length=1.1mm, Max Reverse Leakage Current=100nA, Min Breakdown Voltage=6V, Number of Bidirectional Channels=1, Number of Channels=1, Number of Pins=2, Packaging="Tape and Reel", Radiation Hardening=No, REACH SVHC="No SVHC", Width=0.7mm, Working Voltage=5.5V
D403 D404: "DIODE SCHOTTKY 40V 1A SOD123", Average Rectified Current=1A, Capacitance=110pF, Case/Package=SOD-123-2, Forward Voltage=450mV, Max Forward Surge Current (Ifsm)=25A, Max Operating Temperature=125°C, Max Power Dissipation=450mW, Max Repetitive Reverse Voltage (Vrrm)=40V, Min Operating Temperature=-65°C, Package Quantity=3000, Peak Reverse Current=50uA, Contact Plating=Tin, Current Rating=1A, Element Configuration=Single, Forward Current=1A, Height=1.25mm, Lead Free="Lead Free", Length=2.85mm, Max Reverse Voltage (DC)=40V, Number of Pins=2, Output Current=1A, Packaging="Tape and Reel", Peak Non-Repetitive Surge Current=25A, Polarity=Standard, Radiation Hardening=No, REACH SVHC="No SVHC", Termination=SMD/SMT, Voltage Rating (DC)=40V, Weight=0.000353oz, Width=1.7mm
D405 D406 D409: "Diodes Inc MMSZ5246B-7-F Zener Diode, 16V 5% 500 mW SMT 2-Pin SOD-123", Manufacturer_Name="Diodes Incorporated", Mouser Part Number=621-MMSZ5246B-F, Arrow Part Number=MMSZ5246B-7-F, Arrow Price/Stock=https://www.arrow.com/en/products/mmsz5246b-7-f/diodes-incorporated?region=europe, Datasheet Link=https://www.diodes.com//assets/Datasheets/ds18010.pdf, Geometry.Height=1.45mm, Manufacturer_Part_Number=MMSZ5246B-7-F, Mouser Price/Stock=https://www.mouser.co.uk/ProductDetail/Diodes-Incorporated/MMSZ5246B-7-F?qs=YL8BMuhSknSfmeWTDXIh1Q%3D%3D
D407 D408 D411 D412: "Surface Mount Schottky Barrier Diode, 100 V, -55 to 125 degC, 2-Pin SOD123, RoHS, Tape and Reel", Manufacturer="Diodes Inc", Operating Temperature="-55 to 125 degC", ComponentLink1Description="Manufacturer URL", ComponentLink1URL=http://www.diodes.com/, ComponentLink2Description=Datasheet, ComponentLink2URL=http://diodes.com/datasheets/ds30044.pdf, ComponentLink3Description="Package Specification", ComponentLink3URL=http://diodes.com/datasheets/ds30044.pdf, CT@1 V="12 pF Typ.", DatasheetVersion="Rev. 16-2", IR@1.5 V="0.3 uA Max.", Mounting Technology="Surface Mount", PackageDescription="2-Pin SMD, Body 2.7 x 1.55 mm, Height 1.45 mm", Packing="Tape and Reel", PartNumber=BAT46W-7-F, RoHS=TRUE, V(BR)R="100 V Min.", VF@10 mA="0.45 V Max."
D410: "Fast Switching Diode, 100 V, 0.15 A, -65 to 150 degC, 2-Pin?SOD123, RoHS, Tape and Reel", If - Forward Current=0.15A, Ir - Reverse Current=1uA, Manufacturer=DiodesIncorporated, Max Surge Current=2A, Maximum Operating Temperature=+150C, Minimum Operating Temperature=-65C, Operating Temperature Range=-65Cto+150C, Package / Case=SOD-123, Package Reference=SOD123-2, Peak Reverse Voltage=100V, Vf - Forward Voltage=1.25V, Brand=DiodesIncorporated, Configuration=Single, Datasheet URL=http://www.farnell.com/datasheets/1915529.pdf, Datasheet Version="Rev. 24-2, 10/2013", Factory Pack Quantity=3000, Height=1.25mm, Length=2.85mm, Manufacturer URL=http://www.diodes.com/, Mounting Style=SMD/SMT, Package URL=http://www.diodes.com/datasheets/ds18004.pdf, Packaging=Reel, Product=SwitchingDiodes, Product Category=Diodes-GeneralPurpose,Power,Switching, Recovery Time=4ns, RoHS=True, Series=1N4148, Type=SwitchingDiode, Unit Weight=0.000353oz, Width=1.7mm
D501: library part RED_LED, "LED RED CLEAR CHIP SMD", Case Code (Imperial)=0603, Case Code (Metric)=1608, Color=Red, Forward Current=30mA, Forward Voltage=2.4V, Lens Color=Colorless, Max Operating Temperature=85°C, Min Operating Temperature=-55°C, Package Quantity=1, Power Dissipation=75mW, Reverse Voltage=5V, Test Current=20mA, Case/Package=0603, Depth=0.8mm, Dominant Wavelength=631nm, Height=0.8mm, Illumination Color=Red, Lead Free="Lead Free", Length=1.6mm, Lens Style=Diffused, Lens Transparency=Clear, Luminous Intensity=54mcd, Mount="Surface Mount", Number of Elements=1, Number of LEDs=1, Number of Pins=2, Packaging="Tape and Reel", Power Rating=75mW, Radiation Hardening=No, Viewing Angle=130°, Wavelength=639nm, Width=0.8mm
F401: "Littelfuse 30A FF Non-Resettable Surface Mount Fuse, 250V", Manufacturer_Name="Littelfuse Inc", Copyright="Copyright (C) 2025 Ultra Librarian. All rights reserved.", Manufacturer_Part_Number=0463030.ER
FB501: library part Ferrite_Bead_220R_0603, "Power line Ferrite Bead 220Ω @ 100MHz 2.2A DCR 0.05Ω SMD 0603", Case Code (Imperial)=0603, Case Code (Metric)=1608, Current Rating=2.2A, DC Resistance (DCR)=50mR, Package Quantity=1, Tolerance=25%, Case/Package=0603, Core Material=Ferrite, Height=0.037inch, Impedance=220R, Lead Free="Lead Free", Length=0.063inch, Max DC Current=2.2A, Mount="Surface Mount", Number of Pins=2, Packaging="Cut Tape", REACH SVHC="No SVHC", RoHS Compliant=Yes, Series=MPZ, Width=0.031inch
J1 J3: "Socket, DC supply, male, PIN: 2", Package=Package, Availability="Not in stock", Check_prices=https://www.snapeda.com/parts/XT60PW-M/AMASS/view-part/?ref=eda, MF=AMASS, MP=XT60PW-M, Price=None, SnapEDA_Link=https://www.snapeda.com/parts/XT60PW-M/AMASS/view-part/?ref=snap
J2: "CONN HEADER R/A 5POS 2.5MM", Color=Natural, Contact Resistance=10mR, Current Rating=3A, Flammability Rating="UL94 V-0", Insulation Resistance=1GR, Max Operating Temperature=85°C, Min Operating Temperature=-25°C, Voltage Rating=250V, Connector Type=Header, Contact Finish - Mating=TIN, Contact Material=Brass, Contact Plating=Tin, Contact Shape=Square, Contact Type="Male Pin", Fastening Type=Detent, Insulation Color=Natural, Insulation Material=Nylon, Lead Free="Lead Free", Lead Pitch=2.5mm, Mount="Through Hole", Number of Contacts=5, Number of Positions=5, Number of Rows=1, Orientation="Right Angle", Packaging=Bulk, Pitch=2.5mm, REACH SVHC="No SVHC", Series=XH, Termination=Solder, Voltage Rating (AC)=250V, Wire/Cable Gauge=22AWG
J4: "CONN HEADER VERT 4POS 3.96MM", Flammability Rating="UL94 V-0", Insulation Color=Natural, Voltage Rating=250V, Connector Type=Header, Contact Finish - Mating=TIN, Contact Material=Brass, Contact Shape=Square, Contact Type="Male Pin", Fastening Type=Ramp, Insulation Material=PBT, Lead Free="Lead Free", Mount="Through Hole", Number of Positions=4, Number of Rows=1, Packaging=Bulk, Pitch=3.96mm, Series=VH, Termination=Solder
J5 J10: "CONN HEADER VERT 2POS 3.96MM", Color=Natural, Flammability Rating="UL94 V-0", Voltage Rating=250V, Connector Type=Header, Contact Finish - Mating=TIN, Contact Material=Brass, Contact Mating Length=0.303inch, Contact Plating=Tin, Contact Shape=Square, Contact Type="Male Pin", Fastening Type=Friction, Insulation Color=Natural, Insulation Material=PBT, Lead Free="Lead Free", Mount="Through Hole", Number of Positions=2, Number of Rows=1, Packaging=Bulk, Pitch=0.156inch, Series=VH, Termination=Solder
J6 J7 J8: "CONN HEADER VERT 3POS 2.5MM", Color=Natural, Contact Resistance=20mR, Current Rating=3A, Flammability Rating="UL94 V-0", Housing Color=White, Insulation Resistance=1GR, Max Operating Temperature=85°C, Max Voltage Rating (AC)=250V, Min Operating Temperature=-25°C, Connector Type=Header, Contact Finish - Mating=TIN, Contact Material=Brass, Contact Plating=Tin, Contact Shape=Square, Contact Type="Male Pin", Depth=5.75mm, Fastening Type=Detent, Gender=Male, Housing Material=Polyamide, Insulation Color=Natural, Insulation Material=Nylon, Lead Free="Lead Free", Lead Pitch=2.5mm, Length=9.9mm, Max Current Rating=3A, Max Voltage Rating (DC)=250V, Mount="Through Hole", Number of Contacts=3, Number of Positions=3, Number of Rows=1, Orientation=Straight, Packaging=Bulk, Pitch=2.5mm, REACH SVHC="No SVHC", Series=XH, Termination=Solder, Voltage Rating=250V, Voltage Rating (AC)=250V, Wire/Cable Gauge=22AWG
J9: library part USB_Connector, "USB 2.0 5A 1 16P -40℃~+85℃ SMD USB, DVI, HDMI Connector Assemblies RoHS", LCSC Part Number=C3197684, Manufacturer=Molex, Supplier Part Number=900-2171790001CT-ND, Category=Connectors, Manufacturer Part Number=217179-0001, Pricing="1=0.9, 10=0.745, 100=0.6212 (USD)", RoHS=No, Stock=7228, Supplier=Digikey
J401 J402 J403 J502 J503 J504: "2.54mm (0.1) Pitch SIL Vertical Throughboard Pin Header, 6.1mm mating pin height, tin, 2 contacts", Package=None, Check_prices=https://www.snapeda.com/parts/M20-9990246/Harwin/view-part/?ref=eda, MF=Harwin, MP=M20-9990246, SnapEDA_Link=https://www.snapeda.com/parts/M20-9990246/Harwin/view-part/?ref=snap
J501: "CONN HEADER VERT 2POS 2.5MM", Color=Natural, Contact Resistance=20mR, Current Rating=3A, Housing Color=White, Insulation Resistance=1GR, Max Operating Temperature=85°C, Max Voltage Rating (AC)=250V, Min Operating Temperature=-25°C, Connector Type="Male Pin", Contact Material=Brass, Contact Plating=Tin, Contact Type="Male Pin", Depth=5.75mm, Fastening Type=Detent, Housing Material=Polyamide, Lead Free="Lead Free", Lead Pitch=2.5mm, Length=7.4mm, Max Current Rating=3A, Max Voltage Rating (DC)=250V, Mount="Through Hole", Number of Contacts=2, Number of Positions=2, Number of Rows=1, Orientation=Straight, Packaging=Bulk, Pitch=2.5mm, REACH SVHC="No SVHC", Series=XH, Termination=Solder, Voltage Rating=250V, Voltage Rating (AC)=250V, Wire/Cable Gauge=22AWG
J505: library part 6P_M_HEADER, "CONN HEADER VERT 6POS 2.54MM", Color=Black, Contact Resistance=20mR, Current Rating=4A, Max Operating Temperature=75°C, Max Voltage Rating (AC)=250V, Max Voltage Rating (DC)=250.25kV, Min Operating Temperature=0°C, Package Quantity=1, Connector Type="Male Pin", Contact Material=Brass, Contact Mating Length=0.24inch, Contact Plating=Tin, Contact Type="Male Pin", Depth=2.49mm, Gender=Male, Housing Color=Black, Housing Material=Thermoplastic, Length=15.24mm, Mount="Through Hole", Number of Contacts=6, Number of Positions=6, Number of Rows=1, Orientation=Straight, Packaging=Bulk, Pitch=2.54mm, RoHS Compliant=Yes, Series="KK® 42375", Termination=Solder, Voltage Rating=250V
L101 L201 L301: library part 104CDMCCDS-8R2MC, "Inductor Power Shielded/Molded Wirewound 8.2uH 20% 100KHz Metal 8.3A 0.027Ohm DCR 4040 T/R", Package="Nonstandard Sumida", Availability="In Stock", Check_prices=https://www.snapeda.com/parts/104CDMCCDS-8R2MC/Sumida/view-part/?ref=eda, MF=Sumida, MP=104CDMCCDS-8R2MC, Price=None, Purchase-URL=https://pricing.snapeda.com/search/part/104CDMCCDS-8R2MC/?ref=eda, SnapEDA_Link=https://www.snapeda.com/parts/104CDMCCDS-8R2MC/Sumida/view-part/?ref=snap
NT201 NT301: library part NET-TIE, "Single point connection between nets.", Manufacturer=N/A, CompType=Net-Tie, MountType=SMT, PackageReference=N/A, PartNumber=N/A
Q401: "TRANS NPN 60V 5A SOT89", Collector Base Voltage=150V, Collector Emitter Breakdown Voltage=80V, Collector Emitter Saturation Voltage=170mV, Collector Emitter Voltage=60V, Emitter Base Voltage=7V, Manufacturer="Diodes Inc.", Max Collector Current=5A, Max Junction Temp=+150°C, Package=SOT89, Power Dissipation=1.5W, Temperature="-55°C to +150°C", Temperature Range Low=-55°C, Unity Gain Freq=130MHz, Automotive=Yes, Automotive Grade="Grade 0", Category=Trans, ComponentLink2Description=Datasheet, ComponentLink2URL=https://www.diodes.com/assets/Datasheets/ZXTN2010Z.pdf, Device Class L1="Discrete Semiconductors", Device Class L2=Transistors, Device Class L3=BJTs, Digikey Description="TRANS NPN 60V 5A SOT89", Footprint Url=https://www.diodes.com/assets/Package-Files/SOT89.pdf, Height=1.6mm, Hfe Min=20, Hfe Testic=10A, Hfe Testvce=1V, Lead Free=Yes, Manufacturer Part Number=ZXTN2010ZTA, Mouser Description="Bipolar Transistors - BJT 60V NPN Med Power", Number of Elements=1, Number Of Npn=1, Octopart=https://octopart.com/zxtn2010zta-diodes+inc.-360166, RoHS=TRUE, Rthja Max=83°C/W, Temperature Range High=+150°C
Q402 Q403: library part BSS83PH6327, "SIPMOS(R) Small-Signal-Transistor, -0.33 A, 2 Ohm, -60 V, 3-Pin SOT-23, RoHS, Tape and Reel", Manufacturer=Infineon, Package Description="3-Pin Small Outline Transistor Package, Body 2.9 x 1.3 mm, Pitch 0.95 mm", Package Reference=SOT23, Package Version=04/2016, Datasheet URL=http://media.digikey.com/pdf/Data%20Sheets/Infineon%20PDFs/BSS83P%20H6327.pdf, Datasheet Version="Rev. 1.5, 03/2012", Manufacturer URL=http://www.infineon.com/, Mounting Technology=SurfaceMount, Package URL=http://www.infineon.com/dgdl/Infineon-PG-SOT23-3-5_BSS83PH6327XTSA1-PD-v01_00-EN.pdf?fileId=5546d46254e133b40154f1b7e80354af, Packaging=Reel, Product Category=MOSFET, RoHS=Details
Q404 Q405: library part CSD18531Q5A, "MOSFET N-CH 60V 100A 8VSON", Continuous Drain Current (ID)=100A, Drain to Source Voltage (Vdss)=60V, Gate to Source Voltage (Vgs)=20V, Input Capacitance=3.84nF, Max Operating Temperature=150°C, Max Power Dissipation=3.1W, Min Operating Temperature=-55°C, Resistance=0.0035R, Contact Plating=Tin, Element Configuration=Single, Fall Time=2.7ns, Lead Free="Contains Lead", Mount="Surface Mount", Number of Pins=8, Packaging="Tape and Reel", Rds On Max=4.6mR, Rise Time=7.8ns, RoHS Compliant=Yes, Turn-Off Delay Time=20ns, Turn-On Delay Time=4.4ns
Q406: "2N7002K Series 60 V 2 Ohm SMT N-Channel Enhancement Mode Mosfet - SOT-23-3", Package=None, Availability=Unavailable, MF="{'manufacturer': u'Diodes Incorporated'}", MP=2N7002K-7, Price=None
R1 R2 R203 R204 R303 R304 R406 R407 R412 R414 R433 R434 R435 R501 R503 R504 R505: library part RES_0402, "Chip Resistor 0402 (1005 Metric) Automotive AEC-Q200 Thick Film", Package="1005-2 Panasonic", Availability="In Stock", Check_prices=https://www.snapeda.com/parts/ERJ-2RKF1002X/Panasonic%20Electronic%20Components/view-part/78636/?ref=eda, MF=Panasonic, MP=ERJ-2RKF1002X, Price=None, SnapEDA_Link=https://www.snapeda.com/parts/ERJ-2RKF1002X/Panasonic%20Electronic%20Components/view-part/78636/?ref=snap
R101: library part RES_0805, "49.9kΩ ±0.1% 125mW 0805 Thin Film Resistor AEC-Q200", Case Code (Imperial)=0805, Case Code (Metric)=2012, Max Operating Temperature=155°C, Max Power Dissipation=125mW, Min Operating Temperature=-55°C, Resistance=49.9kΩ, Temperature Coefficient=25ppm/°C, Tolerance=0.1%, Voltage Rating=100V, Case/Package=0805, Composition="Metal Film, Thin Film", Contact Plating=Tin, Depth=1.25mm, Features="Automotive AEC-Q200", Height=500µm, Lead Free="Lead Free", Length=2mm, Lifecycle Status=Production, Military Standard=Not, Mount="Surface Mount", Number of Pins=2, Number of Terminations=2, Packaging="Cut Tape", Power Rating=125mW, Radiation Hardening=No, REACH SVHC=Unknown, RoHS=Compliant, Schedule B="8533210045, 8533210045|8533210045|8533210045|8533210045|8533210045|8533210045|8533210045|8533210045|8533210045|8533210045|8533210045|8533210045|8533210045|8533210045|8533210045|8533210045, 8533210045|8533210045|8533210045|8533210045|8533210045|8533210045|8533210045|8533210045|8533210045|8533210045|8533210045|8533210045|8533210045|8533210045|8533210045|8533210045|8533210045, 8533210045|8533210045|8533210045|8533210045|8533210045|8533210045|8533210045|8533210045|8533210045|8533210045|8533210045|8533210045|8533210045|8533210045|8533210045|8533210045|8533210045|8533210045", Termination=SMD/SMT, Voltage Rating (DC)=100V, Weight=5.499807mg
R102 R103 R201 R202 R205 R206 R301 R302 R305 R306 R408 R409 R416 R417 R418 R419 R420 R422 R423 R424 R425 R426 R427 R428 R429 R430 R431 R432 R502: library part RES_0603, "Â±1% 0.1W, 1/10W Chip Resistor 0603 (1608 Metric) Moisture Resistant Thick Film", Package="1608 Yageo", Check_prices=https://www.snapeda.com/parts/RC0603FR-0791KL/Yageo/view-part/?ref=eda, MF=Yageo, MP=RC0603FR-0791KL, SnapEDA_Link=https://www.snapeda.com/parts/RC0603FR-0791KL/Yageo/view-part/?ref=snap
R401 R402 R403 R404 R405: library part RES_1210, "RES SMD 205K OHM 1% 1/2W 1663", Case Code (Imperial)=1210, Case Code (Metric)=3225, Max Operating Temperature=155°C, Max Power Dissipation=500mW, Min Operating Temperature=-55°C, Package Quantity=1, Temperature Coefficient=100ppm/°C, Tolerance=1%, Voltage Rating=200V, Case/Package=1210, Composition="Thick Film", Contact Plating=Tin, Depth=2.5mm, Features="Automotive AEC-Q200", Height=0.024inch, Lead Free="Lead Free", Length=3.2mm, Military Standard=Not, Mount="Surface Mount", Number of Pins=2, Number of Terminations=2, Packaging="Tape and Reel", Power Rating=500mW, Radiation Hardening=No, Resistance=20R, Voltage Rating (DC)=200V, Weight=0.000564oz, Width=0.098inch
R410: "Resistor, Metal Strip, Res 0.001 Ohms, Pwr-Trg 3 W, Tol 1%, SMD", Package="6432 Stackpole", Check_prices=https://www.snapeda.com/parts/CRE2512-FZ-R001E-3/Bourns/view-part/?ref=eda, MF="Bourns Inc.", MP=CRE2512-FZ-R001E-3, SnapEDA_Link=https://www.snapeda.com/parts/CRE2512-FZ-R001E-3/Bourns/view-part/?ref=snap
R411 R413: library part RES_2512, "Resistor, Thick Film, 100 Ohms, 1 W, 1%, SMT, 2512, TCR 37 ppm/DegC, Cut Tape", Package="6331 Vishay", Check_prices=https://www.snapeda.com/parts/CRCW2512100RFKEG/Vishay+Dale/view-part/?ref=eda, MF="Vishay Dale", MP=CRCW2512100RFKEG, SnapEDA_Link=https://www.snapeda.com/parts/CRCW2512100RFKEG/Vishay+Dale/view-part/?ref=snap
R415 R421: library part RES_1210, "RES SMD 205K OHM 1% 1/2W 1663", Case Code (Imperial)=1210, Case Code (Metric)=3225, Max Operating Temperature=155°C, Max Power Dissipation=500mW, Min Operating Temperature=-55°C, Package Quantity=1, Resistance=20R, Temperature Coefficient=100ppm/°C, Tolerance=1%, Voltage Rating=200V, Case/Package=1210, Composition="Thick Film", Contact Plating=Tin, Depth=2.5mm, Features="Automotive AEC-Q200", Height=0.024inch, Lead Free="Lead Free", Length=3.2mm, Military Standard=Not, Mount="Surface Mount", Number of Pins=2, Number of Terminations=2, Packaging="Tape and Reel", Power Rating=500mW, Radiation Hardening=No, Voltage Rating (DC)=200V, Weight=0.000564oz, Width=0.098inch
S501 S502: "Switch Slide SP Side Slide 0.3A 5VDC 10000Cycles Gull Wing SMD T/R", Package=None, Check_prices=https://www.snapeda.com/parts/SSSS811101/ALPS/view-part/?ref=eda, MF=ALPS, MP=SSSS811101, SnapEDA_Link=https://www.snapeda.com/parts/SSSS811101/ALPS/view-part/?ref=snap
SW501: library part PTS645SM43SMTR92LFS, "Tactile Switch SPST 160gf 4.3mm Gull Wing 6mm x 6mm Surface Mount", Case/Package=SMD/SMT, Color=Black, Contact Resistance=100mR, Current Rating=50mA, Max Operating Temperature=60°C, Max Voltage Rating (DC)=12V, Min Operating Temperature=-20°C, Operating Force=160gf, Package Quantity=1, Actuator Length=0.85mm, Actuator Material=Nylon, Actuator Type=Standard, Contact Material=Silver, Contact Plating=Silver, Depth=9mm, Illumination Type=Non-Illuminated, Lead Free="Lead Free", Length=6mm, Max Current Rating=50mA, Mechanical Life=100000Cycles, Mount="Surface Mount", Orientation=Straight, Packaging="Tape and Reel", REACH SVHC="No SVHC", Switch Function=Off-Mom, Termination="Gull Wing", Throw Configuration=SPST, Voltage Rating (DC)=12V
U101: "IC REG BUCK ADJ 3.5A 8SOPWR", Manufacturer="Texas Instruments", Max Junction Temp=+125°C, Max Supply Voltage=40V, Min Supply Voltage=4V, Nominal Supply Current=40uA, Output Current=3.5A, Output Voltage=0.8-28V, Package=DDA0008E, Switching Frequency=200-2500kHz, Temperature="-40°C to +125°C", Temperature Range Low=-40°C, Automotive=No, Category=IC, ComponentLink2Description=Datasheet, ComponentLink2URL=http://www.ti.com/lit/ds/symlink/lmr14030.pdf, Device Class L1="Integrated Circuits (ICs)", Device Class L2="Power Management ICs", Device Class L3="Voltage Regulators - Switching", Digikey Description="IC REG BUCK ADJ 3.5A 8SOPWR", Height=1.7mm, Ipc Land Pattern Name=SOIC127P600X170-8, Lead Free=Yes, Manufacturer Part Number=LMR14030SDDAR, Max Duty Cycle=97%, Mouser Description="40V, 3.5A SIMPLE SWITCHER, 2.2MHz Step-Down Regulator with 40uA IQ 8-SO PowerPAD -40 to 125", Number Of Outputs=1, Octopart=https://octopart.com/lmr14030sddar-texas+instruments-55347267, Output Type=AdjustableProgrammable, RoHS=TRUE, Standoff Height=0mm, Switching Topology=Buck, Temperature Range High=+125°C